# EAGLE board axiom_beta_sensor_cmv12000_v0.12.bfc06f58 (EAGLE 7.0.0), part 1 of 2
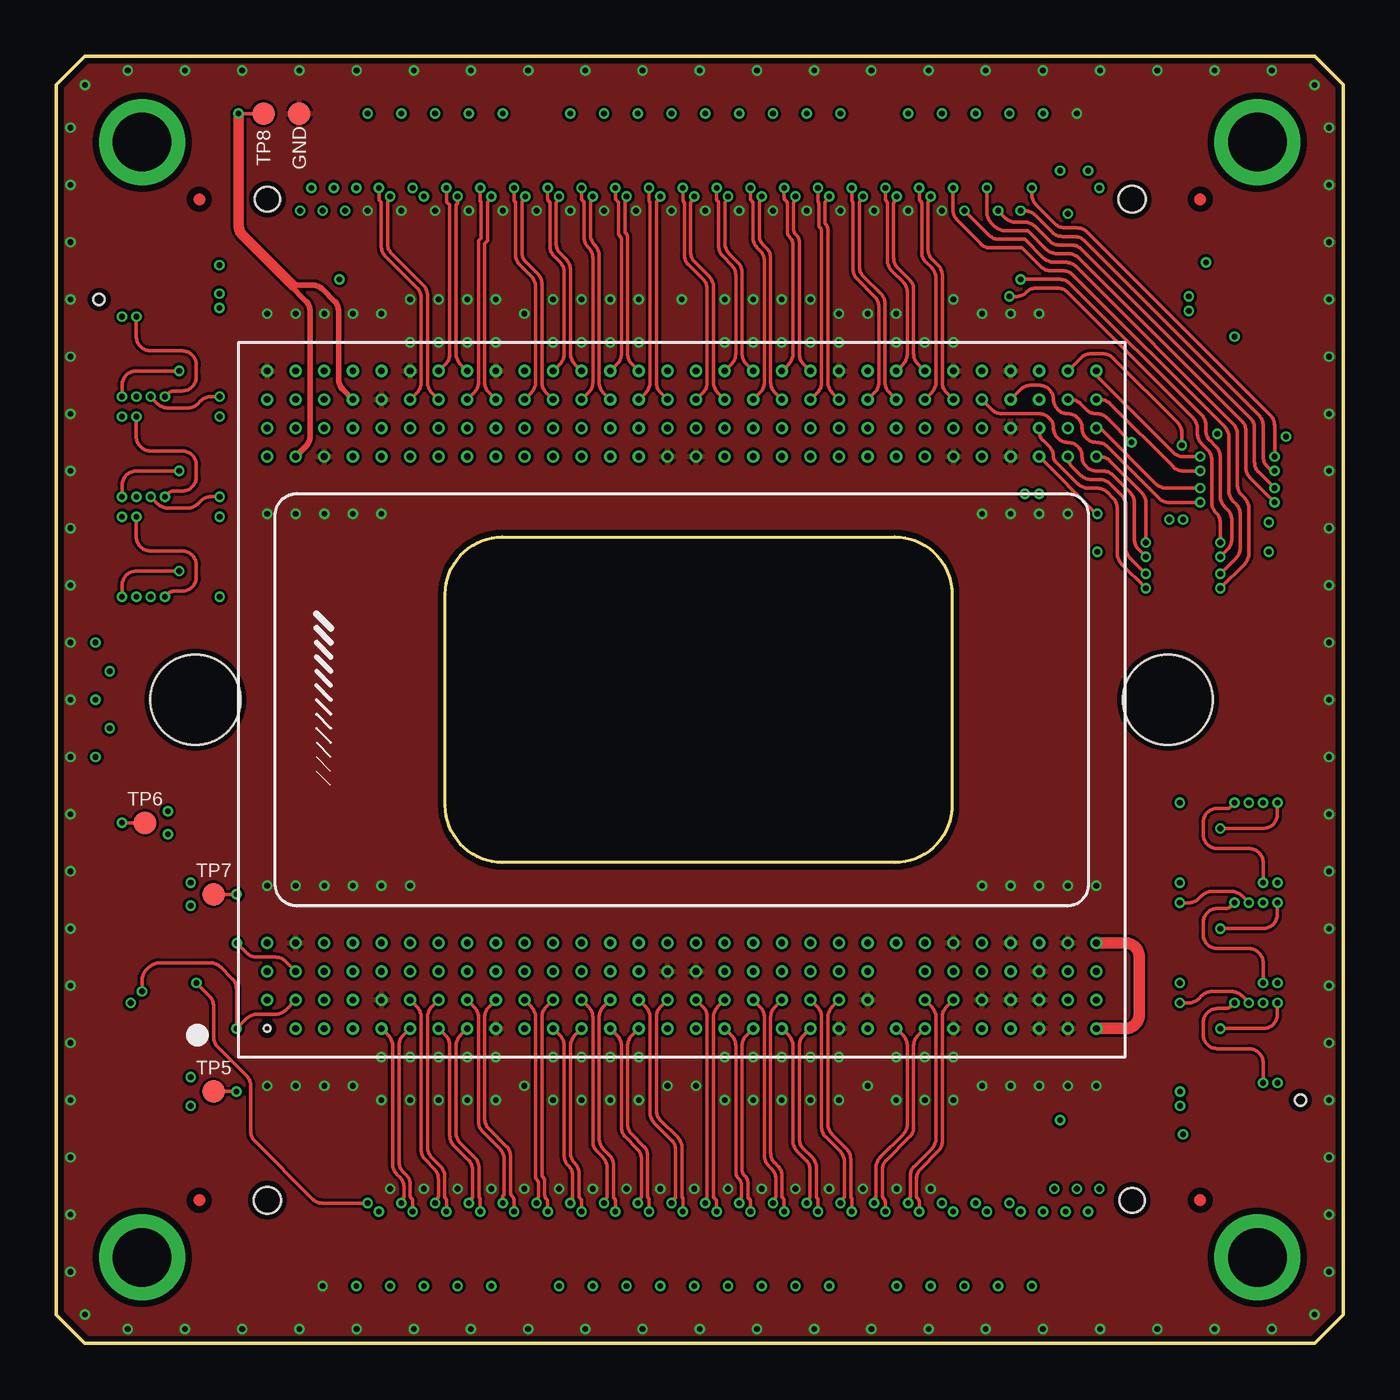
[diagram p0: board, top side]
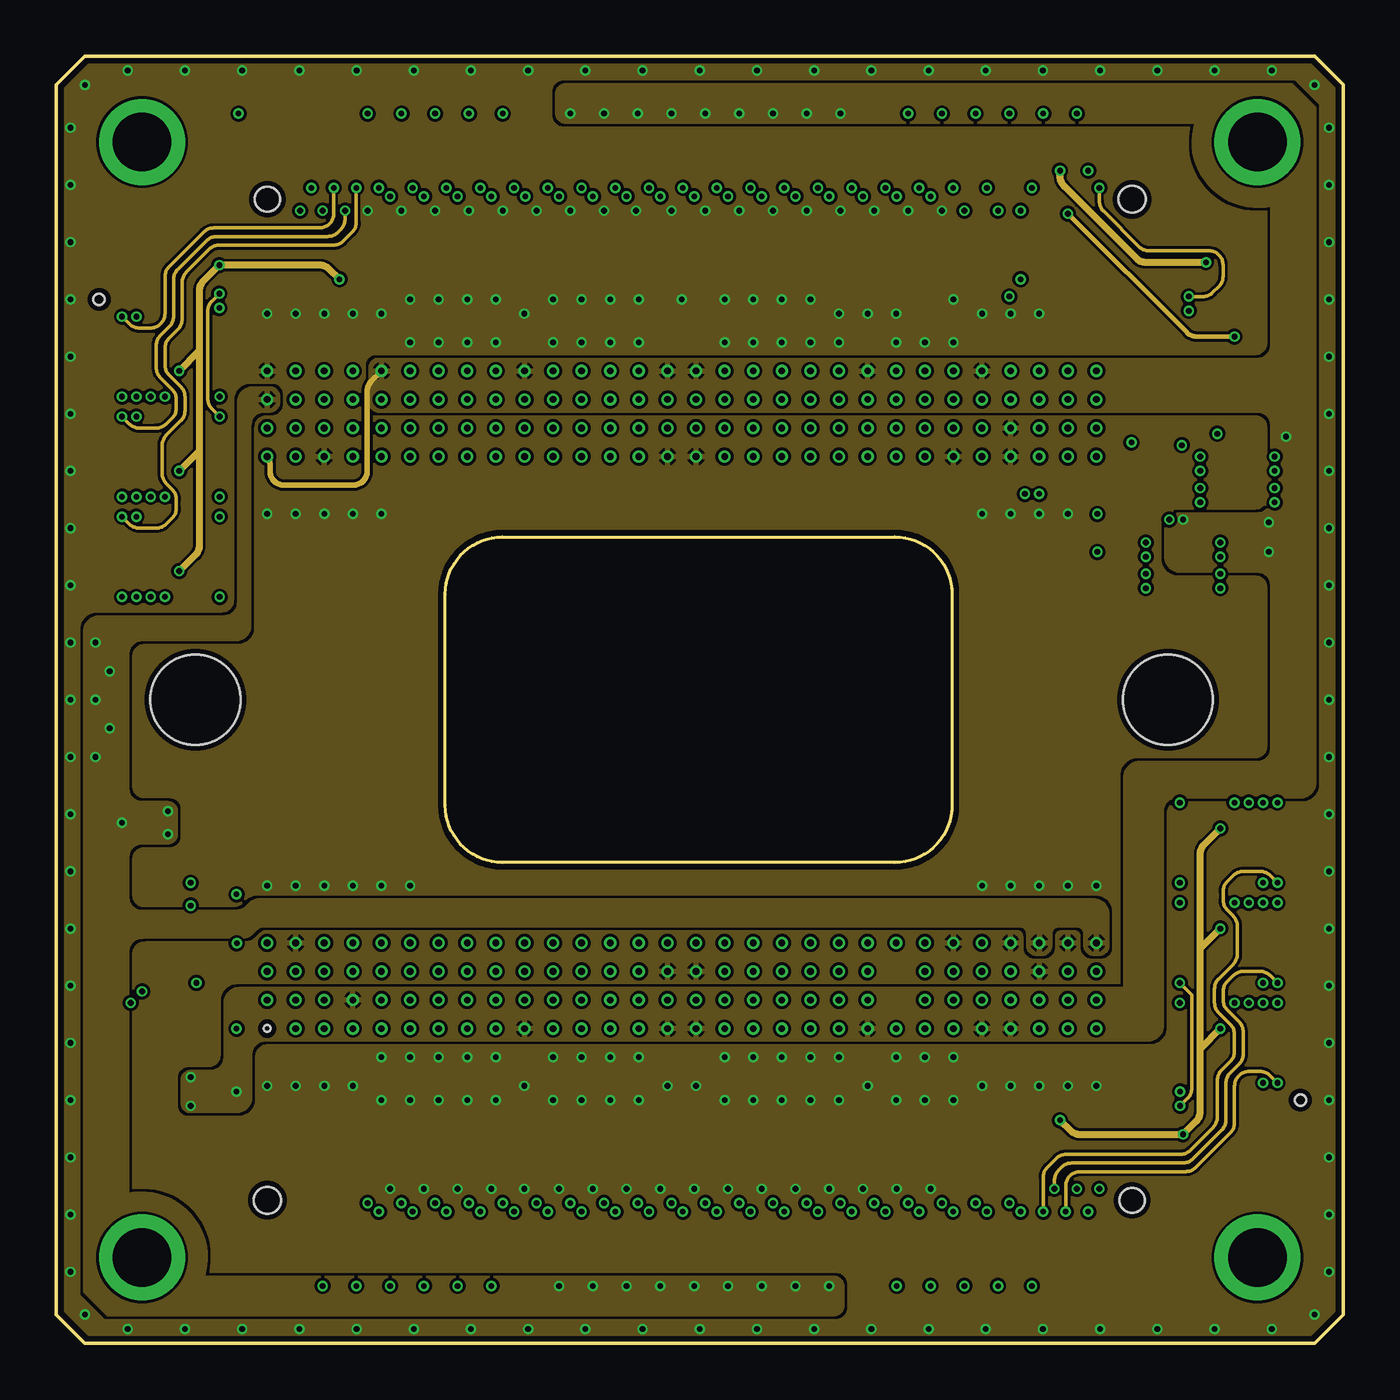
[diagram p1: board, inner layer Route2]
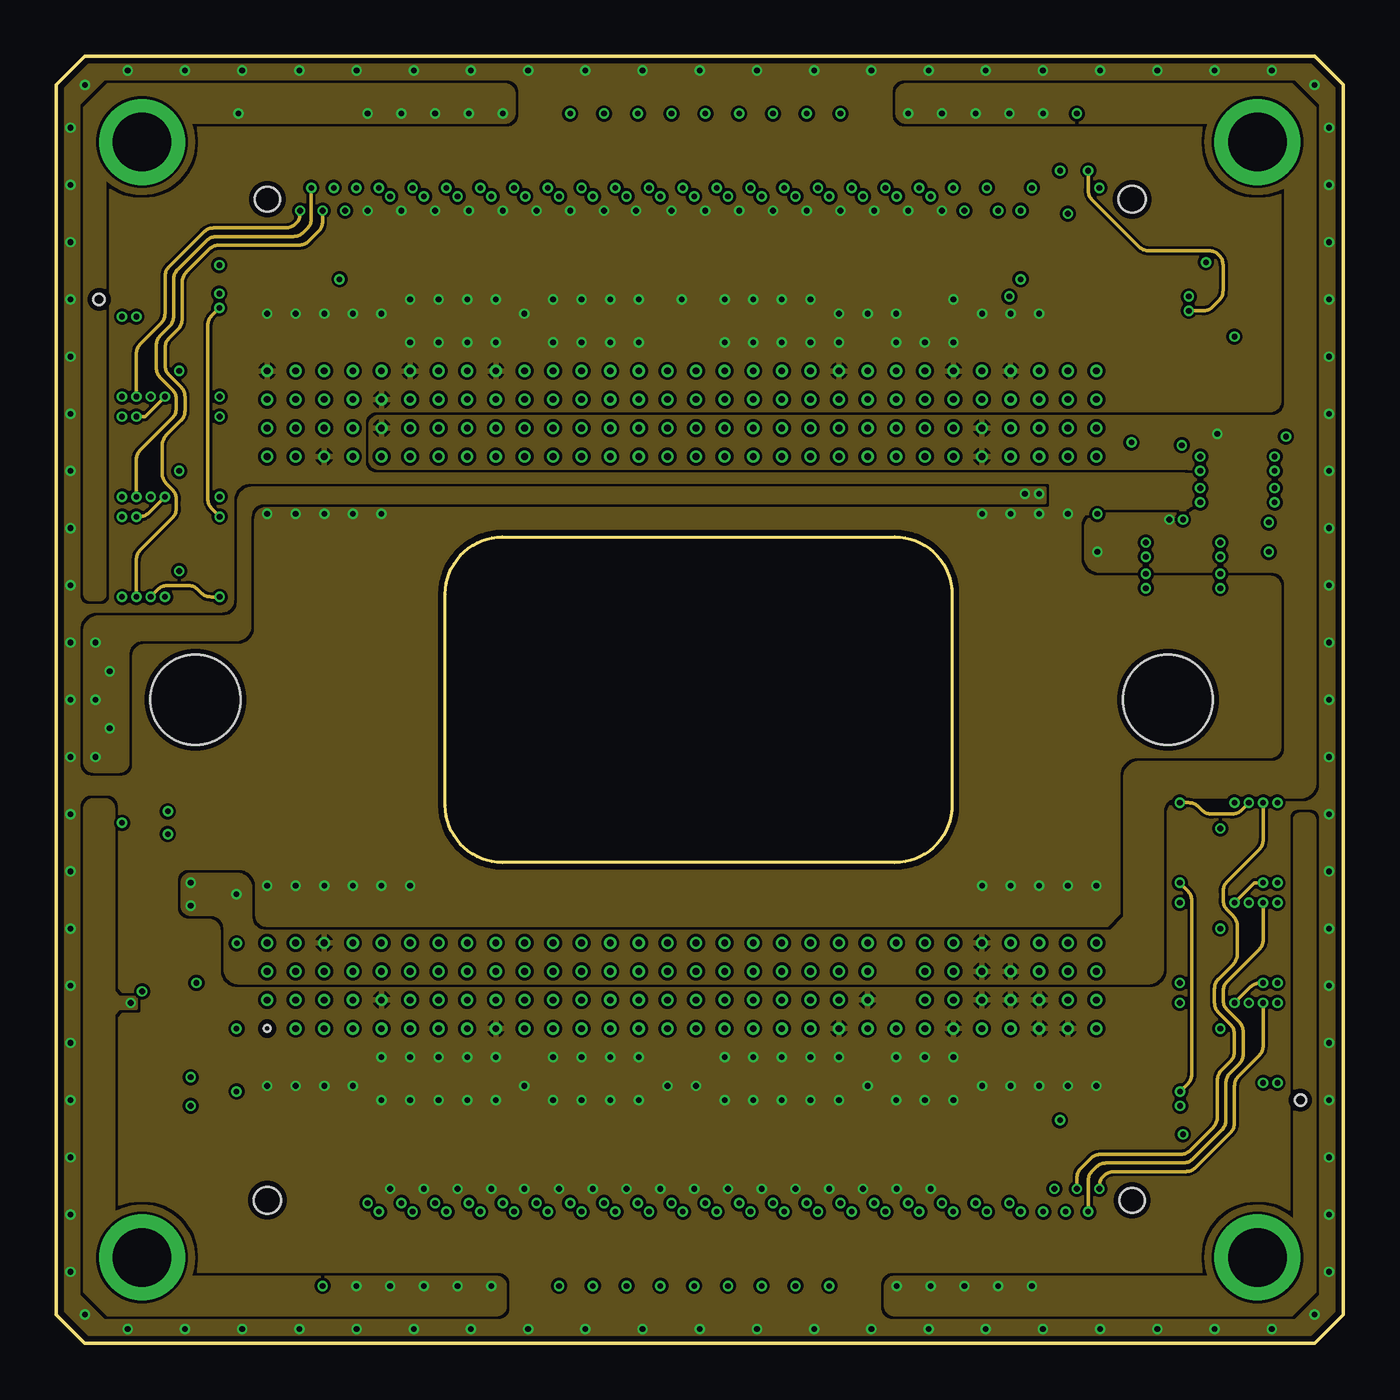
[diagram p2: board, inner layer Route15]
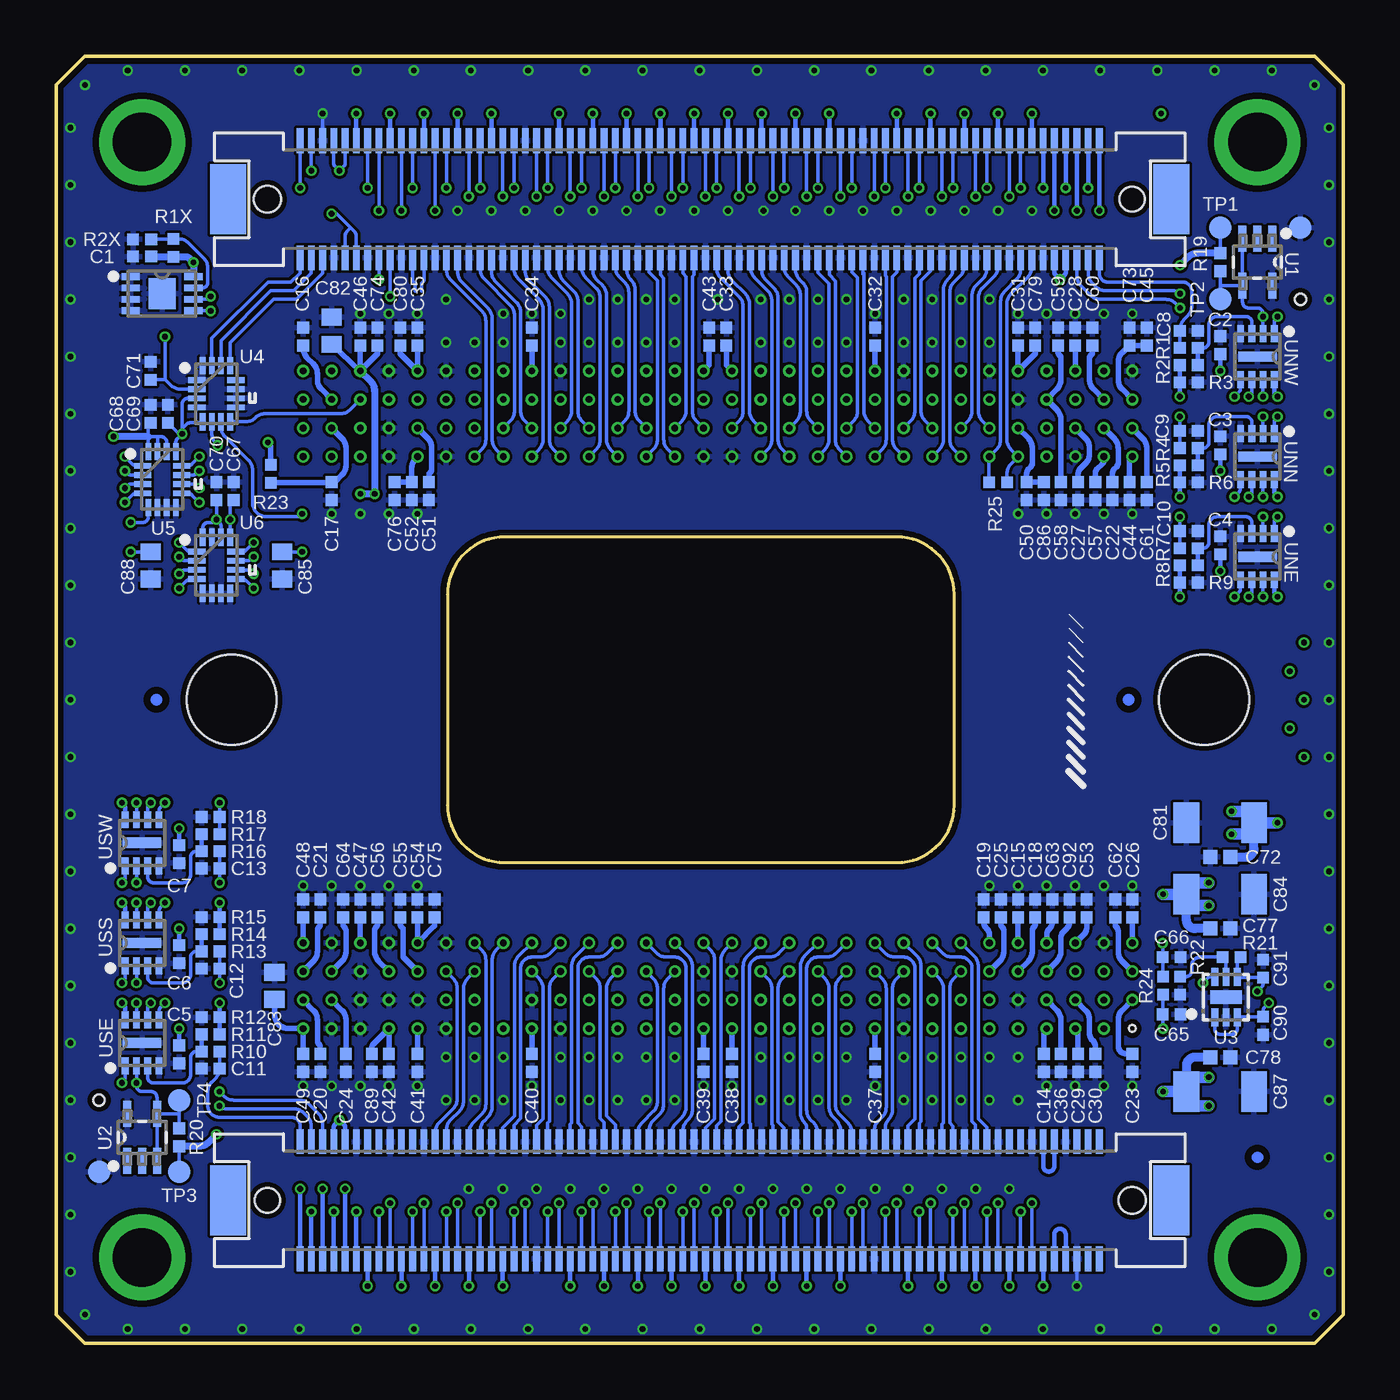
[diagram p3: board, bottom side, seen from below]

Size 57.15 x 57.15 mm. Coordinates in mm from the lower left corner, seen from the top.
Outline: 55.88,57.15 1.27,57.15 0,55.88 0,1.27 1.27,0 55.88,0 57.15,1.27 57.15,55.88 55.88,57.15
Outline: 37.23,21.34 19.81,21.34 arc-90 17.27,23.88 17.27,33.27 arc-90 19.81,35.8 37.23,35.8 arc-90 39.77,33.27 39.77,23.88 arc-90 37.23,21.34
Copper layers (1*2*15*16): Top 0.035559375mm / dielectric 0.17018125mm / Route2 0.01778125mm / dielectric 47mil / Route15 0.01778125mm / dielectric 0.17018125mm / Bottom 0.035559375mm
Design rules "axiom_beta_interface_OSHPark-4layer-tuned *": minimum track width 5mil, minimum drill 10mil, track to track 5mil, track to pad 5mil, pad to pad 5mil, via to via 5mil, smd to smd 5mil, copper to edge 10mil, drill to drill 6mil, minimum pad ring 4mil, minimum via ring 4mil, stop-mask expansion 2mil, vias tented up to drill 15mil, thermal gap 5mil
Net classes: 0 default: width 0.152 mm, drill 0.254 mm; 1 power: width 0.152 mm, drill 0.254 mm
Holes 4 mm at 49.36,28.57 6.18,28.57
Holes 0.5 mm at 55.25,10.79 1.9,46.36
bKeepout: area 1.4,24.8 to 13.4,32.4; area 43.9,24.8 to 56,32.4
tRestrict: area 51.1,1.6 to 55.5,6; area 1.6,51.1 to 6,55.5; area 51.1,51.1 to 55.5,55.5; area 1.6,1.6 to 6,6; area 5.8,5.8 to 6.9,6.9; area 50.2,50.2 to 51.4,51.4; area 5.8,50.2 to 6.9,51.4; area 50.2,5.8 to 51.4,6.9
bRestrict: area 51.1,1.6 to 55.5,6; area 1.6,51.1 to 6,55.5; area 51.1,51.1 to 55.5,55.5; area 1.6,1.6 to 6,6; area 3.3,7.7 to 4.4,8.8; area 52.1,28 to 53.3,29.1; area 9,28 to 10.1,29.1

## Footprints (pad centres in the part's own frame; a part is rotated, then mirrored left to right if it is on the bottom)
0402-C = smd 0.52 x 0.52: 1 -0.4,0; 2 0.4,0
0402-B = smd 0.62 x 0.62: 1 -0.45,0; 2 0.45,0
1206-B = smd 1.15 x 1.8: 1 -1.5,0; 2 1.5,0
0603-C = smd 0.75 x 0.9: 1 -0.6,0; 2 0.6,0
TP10R = smd 1 x 1: TP 0,0
10-30-07-237-400T4 = drill 0.3: A2 -17.945,-14.605; A3 -16.675,-14.605; A4 -15.405,-14.605; A5 -14.135,-14.605; A6 -12.865,-14.605; A7 -11.595,-14.605; A8 -10.325,-14.605; A9 -9.055,-14.605; A10 -7.785,-14.605; A11 -6.515,-14.605; A12 -5.245,-14.605; A13 -3.975,-14.605; A14 -2.705,-14.605; A15 -1.435,-14.605; A16 -0.165,-14.605; A17 1.105,-14.605; A18 2.375,-14.605; A19 3.645,-14.605; A20 4.915,-14.605; A21 6.185,-14.605; A22 7.455,-14.605; A23 8.725,-14.605; A24 9.995,-14.605; A25 11.265,-14.605; A26 12.535,-14.605; A27 13.805,-14.605; A28 15.075,-14.605; A29 16.345,-14.605; A30 17.615,-14.605; B1 -19.215,-13.335; B2 -17.945,-13.335; B3 -16.675,-13.335; B4 -15.405,-13.335; B5 -14.135,-13.335; B6 -12.865,-13.335; B7 -11.595,-13.335; B8 -10.325,-13.335; B9 -9.055,-13.335; B10 -7.785,-13.335; B11 -6.515,-13.335; B12 -5.245,-13.335; B13 -3.975,-13.335; B14 -2.705,-13.335; B15 -1.435,-13.335; B16 -0.165,-13.335; B17 1.105,-13.335; B18 2.375,-13.335; B19 3.645,-13.335; B20 4.915,-13.335; B21 6.185,-13.335; B22 7.455,-13.335; B24 9.995,-13.335; B25 11.265,-13.335; B26 12.535,-13.335; B27 13.805,-13.335; B28 15.075,-13.335; B29 16.345,-13.335; B30 17.615,-13.335; C1 -19.215,-12.065; C2 -17.945,-12.065; C3 -16.675,-12.065; C4 -15.405,-12.065; C5 -14.135,-12.065; C6 -12.865,-12.065; C7 -11.595,-12.065; C8 -10.325,-12.065; C9 -9.055,-12.065; C10 -7.785,-12.065; C11 -6.515,-12.065; C12 -5.245,-12.065; C13 -3.975,-12.065; C14 -2.705,-12.065; C15 -1.435,-12.065; C16 -0.165,-12.065; C17 1.105,-12.065; C18 2.375,-12.065; C19 3.645,-12.065; C20 4.915,-12.065; C21 6.185,-12.065; C22 7.455,-12.065; C24 9.995,-12.065; C25 11.265,-12.065; C26 12.535,-12.065; C27 13.805,-12.065; C28 15.075,-12.065; C29 16.345,-12.065; C30 17.615,-12.065; D1 -19.215,-10.795; D2 -17.945,-10.795; D3 -16.675,-10.795; D4 -15.405,-10.795; D5 -14.135,-10.795; D6 -12.865,-10.795; D7 -11.595,-10.795; D8 -10.325,-10.795; D9 -9.055,-10.795; D10 -7.785,-10.795; D11 -6.515,-10.795; D12 -5.245,-10.795; D13 -3.975,-10.795; D14 -2.705,-10.795; D15 -1.435,-10.795; D16 -0.165,-10.795; D17 1.105,-10.795; D18 2.375,-10.795; D19 3.645,-10.795; D20 4.915,-10.795; D21 6.185,-10.795; D22 7.455,-10.795; D23 8.725,-10.795; D24 9.995,-10.795; D25 11.265,-10.795; D26 12.535,-10.795; D27 13.805,-10.795; D28 15.075,-10.795; D29 16.345,-10.795; D30 17.615,-10.795; E1 -19.215,10.795; E2 -17.945,10.795; E3 -16.675,10.795; E4 -15.405,10.795; E5 -14.135,10.795; E6 -12.865,10.795; E7 -11.595,10.795; E8 -10.325,10.795; E9 -9.055,10.795; E10 -7.785,10.795; E11 -6.515,10.795; E12 -5.245,10.795; E13 -3.975,10.795; E14 -2.705,10.795; E15 -1.435,10.795; E16 -0.165,10.795; E17 1.105,10.795; E18 2.375,10.795; E19 3.645,10.795; E20 4.915,10.795; E21 6.185,10.795; E22 7.455,10.795; E23 8.725,10.795; E24 9.995,10.795; E25 11.265,10.795; E26 12.535,10.795; E27 13.805,10.795; E28 15.075,10.795; E29 16.345,10.795; E30 17.615,10.795; F1 -19.215,12.065; F2 -17.945,12.065; F3 -16.675,12.065; F4 -15.405,12.065; F5 -14.135,12.065; F6 -12.865,12.065; F7 -11.595,12.065; F8 -10.325,12.065; F9 -9.055,12.065; F10 -7.785,12.065; F11 -6.515,12.065; F12 -5.245,12.065; F13 -3.975,12.065; F14 -2.705,12.065; F15 -1.435,12.065; F16 -0.165,12.065; F17 1.105,12.065; F18 2.375,12.065; F19 3.645,12.065; F20 4.915,12.065; F21 6.185,12.065; F22 7.455,12.065; F23 8.725,12.065; F24 9.995,12.065; F25 11.265,12.065; F26 12.535,12.065; F27 13.805,12.065; F28 15.075,12.065; F29 16.345,12.065; F30 17.615,12.065; G1 -19.215,13.335; G2 -17.945,13.335; G3 -16.675,13.335; G4 -15.405,13.335; G5 -14.135,13.335; G6 -12.865,13.335; G7 -11.595,13.335; G8 -10.325,13.335; G9 -9.055,13.335; G10 -7.785,13.335; G11 -6.515,13.335; G12 -5.245,13.335; G13 -3.975,13.335; G14 -2.705,13.335; G15 -1.435,13.335; G16 -0.165,13.335; G17 1.105,13.335; G18 2.375,13.335; G19 3.645,13.335; G20 4.915,13.335; G21 6.185,13.335; G22 7.455,13.335; G23 8.725,13.335; G24 9.995,13.335; G25 11.265,13.335; G26 12.535,13.335; G27 13.805,13.335; G28 15.075,13.335; G29 16.345,13.335; G30 17.615,13.335; H1 -19.215,14.605; H2 -17.945,14.605; H3 -16.675,14.605; H4 -15.405,14.605; H5 -14.135,14.605; H6 -12.865,14.605; H7 -11.595,14.605; H8 -10.325,14.605; H9 -9.055,14.605; H10 -7.785,14.605; H11 -6.515,14.605; H12 -5.245,14.605; H13 -3.975,14.605; H14 -2.705,14.605; H15 -1.435,14.605; H16 -0.165,14.605; H17 1.105,14.605; H18 2.375,14.605; H19 3.645,14.605; H20 4.915,14.605; H21 6.185,14.605; H22 7.455,14.605; H23 8.725,14.605; H24 9.995,14.605; H25 11.265,14.605; H26 12.535,14.605; H27 13.805,14.605; H28 15.075,14.605; H29 16.345,14.605; H30 17.615,14.605 | hole 0.3: -19.215,-14.605
SOT65P210X110-5N = smd 1.168 x 0.356: 1 -1.041,0.66; 2 -1.041,0; 3 -1.041,-0.66; 4 1.041,-0.66; 5 1.041,0.66
MLF-6 = smd 0.3 x 0.8: 1 -0.5,-0.9; 2 0,-0.9; 3 0.5,-0.9; 4 0.5,0.9; 5 0,0.9; 6 -0.5,0.9 | smd 1.4 x 0.6: EP 0,0
QFN40P185X265X55-16N = smd 0.762 x 0.254: 1 -0.864,0.61; 2 -0.864,0.203; 3 -0.864,-0.203; 4 -0.864,-0.61; 9 0.864,-0.61; 10 0.864,-0.203; 11 0.864,0.203; 12 0.864,0.61 | smd 0.254 x 0.762: 5 -0.61,-1.245; 6 -0.203,-1.245; 7 0.203,-1.245; 8 0.61,-1.245; 13 0.61,1.245; 14 0.203,1.245; 15 -0.203,1.245; 16 -0.61,1.245
DFN200X300X100-9N = smd 0.813 x 0.305: 1 -1.397,0.762; 2 -1.397,0.254; 3 -1.397,-0.254; 4 -1.397,-0.762; 5 1.397,-0.762; 6 1.397,-0.254; 7 1.397,0.254; 8 1.397,0.762 | smd 1.194 x 1.397: EP 0,0
DFN200X200X100-9N = smd 0.75 x 0.3: 1 -1.025,0.75; 2 -1.025,0.25; 3 -1.025,-0.25; 4 -1.025,-0.75; 5 1.025,-0.75; 6 1.025,-0.25; 7 1.025,0.25; 8 1.025,0.75 | smd 0.45 x 1.7: EP 0,0
FX10A-144P = smd 0.3 x 1.1: 1 -17.75,-2.6; 2 -17.75,2.6; 3 -17.25,-2.6; 4 -17.25,2.6; 5 -16.75,-2.6; 6 -16.75,2.6; 7 -16.25,-2.6; 8 -16.25,2.6; 9 -15.75,-2.6; 10 -15.75,2.6; 11 -15.25,-2.6; 12 -15.25,2.6; 13 -14.75,-2.6; 14 -14.75,2.6; 15 -14.25,-2.6; 16 -14.25,2.6; 17 -13.75,-2.6; 18 -13.75,2.6; 19 -13.25,-2.6; 20 -13.25,2.6; 21 -12.75,-2.6; 22 -12.75,2.6; 23 -12.25,-2.6; 24 -12.25,2.6; 25 -11.75,-2.6; 26 -11.75,2.6; 27 -11.25,-2.6; 28 -11.25,2.6; 29 -10.75,-2.6; 30 -10.75,2.6; 31 -10.25,-2.6; 32 -10.25,2.6; 33 -9.75,-2.6; 34 -9.75,2.6; 35 -9.25,-2.6; 36 -9.25,2.6; 37 -8.75,-2.6; 38 -8.75,2.6; 39 -8.25,-2.6; 40 -8.25,2.6; 41 -7.75,-2.6; 42 -7.75,2.6; 43 -7.25,-2.6; 44 -7.25,2.6; 45 -6.75,-2.6; 46 -6.75,2.6; 47 -6.25,-2.6; 48 -6.25,2.6; 49 -5.75,-2.6; 50 -5.75,2.6; 51 -5.25,-2.6; 52 -5.25,2.6; 53 -4.75,-2.6; 54 -4.75,2.6; 55 -4.25,-2.6; 56 -4.25,2.6; 57 -3.75,-2.6; 58 -3.75,2.6; 59 -3.25,-2.6; 60 -3.25,2.6; 61 -2.75,-2.6; 62 -2.75,2.6; 63 -2.25,-2.6; 64 -2.25,2.6; 65 -1.75,-2.6; 66 -1.75,2.6; 67 -1.25,-2.6; 68 -1.25,2.6; 69 -0.75,-2.6; 70 -0.75,2.6; 71 -0.25,-2.6; 72 -0.25,2.6; 73 0.25,-2.6; 74 0.25,2.6; 75 0.75,-2.6; 76 0.75,2.6; 77 1.25,-2.6; 78 1.25,2.6; 79 1.75,-2.6; 80 1.75,2.6; 81 2.25,-2.6; 82 2.25,2.6; 83 2.75,-2.6; 84 2.75,2.6; 85 3.25,-2.6; 86 3.25,2.6; 87 3.75,-2.6; 88 3.75,2.6; 89 4.25,-2.6; 90 4.25,2.6; 91 4.75,-2.6; 92 4.75,2.6; 93 5.25,-2.6; 94 5.25,2.6; 95 5.75,-2.6; 96 5.75,2.6; 97 6.25,-2.6; 98 6.25,2.6; 99 6.75,-2.6; 100 6.75,2.6; 101 7.25,-2.6; 102 7.25,2.6; 103 7.75,-2.6; 104 7.75,2.6; 105 8.25,-2.6; 106 8.25,2.6; 107 8.75,-2.6; 108 8.75,2.6; 109 9.25,-2.6; 110 9.25,2.6; 111 9.75,-2.6; 112 9.75,2.6; 113 10.25,-2.6; 114 10.25,2.6; 115 10.75,-2.6; 116 10.75,2.6; 117 11.25,-2.6; 118 11.25,2.6; 119 11.75,-2.6; 120 11.75,2.6; 121 12.25,-2.6; 122 12.25,2.6; 123 12.75,-2.6; 124 12.75,2.6; 125 13.25,-2.6; 126 13.25,2.6; 127 13.75,-2.6; 128 13.75,2.6; 129 14.25,-2.6; 130 14.25,2.6; 131 14.75,-2.6; 132 14.75,2.6; 133 15.25,-2.6; 134 15.25,2.6; 135 15.75,-2.6; 136 15.75,2.6; 137 16.25,-2.6; 138 16.25,2.6; 139 16.75,-2.6; 140 16.75,2.6; 141 17.25,-2.6; 142 17.25,2.6; 143 17.75,-2.6; 144 17.75,2.6 | smd 1.6 x 3.1: M1 -20.95,0; M2 20.95,0 | hole 1.1: -19.2,0 | hole 1.2: 19.2,0

## Placement (x,y rotation side)
C1  100n  [0402-C]  53.34,48.26 180 bottom
C2  100n  [0402-C]  5.46,44.32 90 bottom
C3  100n  [0402-C]  5.46,39.88 90 bottom
C4  100n  [0402-C]  5.46,35.43 90 bottom
C5  100n  [0402-C]  51.69,12.83 270 bottom
C6  100n  [0402-C]  51.69,17.27 270 bottom
C7  100n  [0402-C]  51.69,21.72 270 bottom
C8  1µ  [0402-C]  6.86,44.96 0 bottom
C9  1µ  [0402-C]  6.86,40.51 0 bottom
C10  1µ  [0402-C]  6.86,36.07 0 bottom
C11  1µ  [0402-C]  50.29,12.19 180 bottom
C12  1µ  [0402-C]  50.29,16.64 180 bottom
C13  1µ  [0402-C]  50.29,21.08 180 bottom
C14  100n  [0402-C]  13.3,12.45 270 bottom
C15  100n  [0402-C]  14.44,19.3 90 bottom
C16  100n  [0402-C]  46.19,44.7 90 bottom
C17  100n  [0402-C]  44.92,37.85 270 bottom
C18  100n  [0402-C]  13.68,19.3 90 bottom
C19  100n  [0402-C]  15.96,19.3 90 bottom
C20  100n  [0402-C]  45.43,12.45 270 bottom
C21  100n  [0402-C]  45.43,19.3 90 bottom
C22  100n  [0402-C]  10.25,37.85 90 bottom
C23  100n  [0402-C]  9.36,12.45 90 bottom
C24  100n  [0402-C]  44.28,12.45 90 bottom
C25  100n  [0402-C]  15.2,19.3 270 bottom
C26  100n  [0402-C]  9.36,19.3 270 bottom
C27  100n  [0402-C]  11.77,37.85 90 bottom
C28  100n  [0402-C]  11.9,44.7 270 bottom
C29  100n  [0402-C]  11.77,12.45 270 bottom
C30  100n  [0402-C]  11.01,12.45 270 bottom
C31  100n  [0402-C]  14.44,44.7 90 bottom
C32  100n  [0402-C]  20.79,44.7 90 bottom
C33  100n  [0402-C]  27.39,44.7 90 bottom
C34  100n  [0402-C]  36.03,44.7 90 bottom
C35  100n  [0402-C]  41.11,44.7 90 bottom
C36  100n  [0402-C]  12.54,12.45 270 bottom
C37  100n  [0402-C]  20.79,12.45 270 bottom
C38  100n  [0402-C]  27.14,12.45 270 bottom
C39  100n  [0402-C]  28.41,12.45 270 bottom
C40  100n  [0402-C]  36.03,12.45 270 bottom
C41  100n  [0402-C]  41.11,12.45 270 bottom
C42  100n  [0402-C]  42.38,12.45 270 bottom
C43  100n  [0402-C]  28.16,44.7 90 bottom
C44  100n  [0402-C]  9.49,37.85 270 bottom
C45  100n  [0402-C]  8.72,44.7 90 bottom
C46  100n  [0402-C]  43.65,44.7 90 bottom
C47  100n  [0402-C]  43.65,19.3 90 bottom
C48  100n  [0402-C]  46.19,19.3 90 bottom
C49  100n  [0402-C]  46.19,12.45 270 bottom
C50  100n  [0402-C]  14.06,37.85 270 bottom
C51  100n  [0402-C]  40.6,37.85 270 bottom
C52  100n  [0402-C]  41.36,37.85 270 bottom
C53  100n  [0402-C]  11.39,19.3 90 bottom
C54  100n  [0402-C]  41.11,19.3 90 bottom
C55  100n  [0402-C]  41.87,19.3 90 bottom
C56  100n  [0402-C]  42.89,19.3 90 bottom
C57  100n  [0402-C]  11.01,37.85 270 bottom
C58  100n  [0402-C]  12.54,37.85 270 bottom
C59  4µ7  [0402-C]  12.66,44.7 90 bottom
C60  100n  [0402-C]  11.14,44.7 90 bottom
C61  100n  [0402-C]  8.72,37.85 270 bottom
C62  100n  [0402-C]  10.12,19.3 90 bottom
C63  100n  [0402-C]  12.92,19.3 90 bottom
C64  100n  [0402-C]  44.41,19.3 90 bottom
C65  100n  [0402-C]  7.62,14.6 0 bottom
C66  100n  [0402-C]  7.62,17.14 0 bottom
C67  100n  [0402-C]  49.28,37.85 90 bottom
C68  100n  [0402-C]  52.96,41.27 90 bottom
C69  100n  [0402-C]  52.2,41.27 90 bottom
C70  100n  [0402-C]  50.04,37.85 90 bottom
C71  100n  [0402-C]  52.96,43.18 90 bottom
C72  4µ7  [0402-B]  5.46,21.59 180 bottom
C73  4µ7  [0402-C]  9.49,44.7 90 bottom
C74  4µ7  [0402-C]  42.89,44.7 90 bottom
C75  4µ7  [0402-C]  40.35,19.3 90 bottom
C76  4µ7  [0402-C]  42.13,37.85 270 bottom
C77  4µ7  [0402-B]  5.46,18.41 0 bottom
C78  4µ7  [0402-B]  5.46,12.7 0 bottom
C79  4µ7  [0402-C]  13.68,44.7 90 bottom
C80  4µ7  [0402-C]  41.87,44.7 90 bottom
C81  100µ  [1206-B]  5.46,23.11 180 bottom
C82  10µ  [0603-C]  44.92,44.96 90 bottom
C83  10µ  [0603-C]  47.46,15.88 90 bottom
C84  100µ  [1206-B]  5.46,19.94 0 bottom
C85  10µ  [0603-C]  47.12,34.54 270 bottom
C86  4µ7  [0402-C]  13.3,37.85 270 bottom
C87  100µ  [1206-B]  5.46,11.18 0 bottom
C88  10µ  [0603-C]  52.96,34.54 270 bottom
C89  4µ7  [0402-C]  43.14,12.45 270 bottom
C90  4µ7  [0402-C]  3.56,14.1 270 bottom
C91  4µ7  [0402-C]  3.56,16.64 270 bottom
C92  100n  [0402-C]  12.15,19.3 90 bottom
GND  TPTP10R  [TP10R]  10.79,54.61 0 top
GND75  TPTP10R  [TP10R]  1.9,49.53 180 bottom
GND77  TPTP10R  [TP10R]  55.25,7.62 180 bottom
PARALLELLA  [PARALLELLA-FRAME]  28.57,28.57 0 top
R1  [0402-C]  6.86,44.2 0 bottom
R1X  [0402-C]  51.94,48.64 90 bottom
R2  [0402-C]  6.86,43.43 180 bottom
R2X  [0402-C]  53.34,49.02 180 bottom
R3  [0402-C]  6.86,42.67 0 bottom
R4  [0402-C]  6.86,39.75 0 bottom
R5  [0402-C]  6.86,38.99 180 bottom
R6  [0402-C]  6.86,38.23 0 bottom
R7  [0402-C]  6.86,35.31 0 bottom
R8  [0402-C]  6.86,34.54 180 bottom
R9  [0402-C]  6.86,33.78 0 bottom
R10  [0402-C]  50.29,12.95 180 bottom
R11  [0402-C]  50.29,13.72 0 bottom
R12  [0402-C]  50.29,14.48 180 bottom
R13  [0402-C]  50.29,17.4 180 bottom
R14  [0402-C]  50.29,18.16 0 bottom
R15  [0402-C]  50.29,18.92 180 bottom
R16  [0402-C]  50.29,21.84 180 bottom
R17  [0402-C]  50.29,22.61 0 bottom
R18  [0402-C]  50.29,23.37 180 bottom
R19  [0402-C]  5.46,48.01 270 bottom
R20  [0402-C]  51.69,9.14 90 bottom
R21  [0402-C]  4.95,17.14 0 bottom
R22  [0402-C]  7.24,15.88 90 bottom
R23  [0402-C]  47.62,38.61 270 bottom
R24  [0402-C]  8,15.88 90 bottom
R25  [0402-C]  15.33,38.23 180 bottom
SENSOR  CMV12000ANDON  [10-30-07-237-400T4]  28.57,28.57 0 top
TP1  TPTP10R  [TP10R]  5.46,49.53 0 bottom
TP2  TPTP10R  [TP10R]  5.46,46.36 0 bottom
TP3  TPTP10R  [TP10R]  51.69,7.62 0 bottom
TP4  TPTP10R  [TP10R]  51.69,10.79 0 bottom
TP5  TPTP10R  [TP10R]  6.98,11.18 0 top
TP6  TPTP10R  [TP10R]  3.94,23.11 0 top
TP7  TPTP10R  [TP10R]  6.98,19.94 0 top
TP8  TPTP10R  [TP10R]  9.21,54.61 0 top
U1  TLV431ACDCKR  [SOT65P210X110-5N]  3.81,48.01 270 bottom
U2  TLV431ACDCKR  [SOT65P210X110-5N]  53.34,9.14 90 bottom
U3  MIC47050  [MLF-6]  5.21,15.37 0 bottom
U4  SN74AVC4T245RSV  [QFN40P185X265X55-16N]  50.04,42.16 0 bottom
U5  SN74AVC4T774RSV  [QFN40P185X265X55-16N]  52.45,38.35 0 bottom
U6  SN74AVC4T774RSV  [QFN40P185X265X55-16N]  50.04,34.54 0 bottom
U$1  [µZ-FRAME]  28.57,28.57 0 top
UEP  BR24G04NUX  [DFN200X300X100-9N]  52.45,46.61 0 bottom
UNE  TS332IQ2T  [DFN200X200X100-9N]  3.81,34.92 270 bottom
UNN  TS332IQ2T  [DFN200X200X100-9N]  3.81,39.37 270 bottom
UNW  TS332IQ2T  [DFN200X200X100-9N]  3.81,43.81 270 bottom
USE  TS332IQ2T  [DFN200X200X100-9N]  53.34,13.33 90 bottom
USS  TS332IQ2T  [DFN200X200X100-9N]  53.34,17.78 90 bottom
USW  TS332IQ2T  [DFN200X200X100-9N]  53.34,22.23 90 bottom
X-NORTH  FX10-144P  [FX10A-144P]  28.57,50.8 180 bottom
X-SOUTH  FX10-144P  [FX10A-144P]  28.57,6.35 0 bottom

## Library data of the parts
C1-C92 R1 R1X R2 R2X R3-R25 = generic-rcl
GND GND75 GND77 TP1-TP8 = testpad
PARALLELLA = parallella
SENSOR = cmosis
U1 U2 = vref
U3 = ldo
U4-U6 = lvltrans
U$1 = microzed
UEP = eeprom
UNE UNN UNW USE USS USW = comparator
X-NORTH X-SOUTH = fx10

## Nets
CLK_IN: SENSOR.E30 U6.12
FRAME_REQ: SENSOR.G30 U5.11
GND: C1.2 C2.2 C3.2 C4.2 C5.2 C6.2 C7.2 C8.2 C9.2 C10.2 C11.2 C12.2 C13.2 C14.2 C15.2 C16.2 C17.2 C18.2 C19.2 C20.2 C21.2 C22.1 C23.1 C24.1 C25.1 C26.1 C27.1 C28.1 C29.2 C30.2 C31.2 C32.2 C33.2 C34.2 C35.2 C36.2 C37.2 C38.2 C39.2 C40.2 C41.2 C42.2 C43.2 C44.2 C45.2 C46.2 C47.2 C48.2 C49.2 C50.2 C51.2 C52.2 C53.2 C54.2 C55.2 C56.2 C57.2 C58.2 C59.2 C60.2 C61.2 C62.2 C63.2 C64.2 C65.2 C66.2 C67.2 C68.2 C69.2 C70.2 C71.2 C72.2 C73.2 C74.2 C75.2 C76.2 C77.2 C78.2 C79.2 C80.2 C81.2 C82.2 C83.2 C84.2 C85.2 C86.2 C87.2 C88.2 C89.2 C90.2 C91.1 C92.2 GND75.TP GND77.TP GND.TP R2X.2 R3.2 R6.2 R9.2 R12.2 R15.2 R18.2 R22.1 SENSOR.A9 SENSOR.A21 SENSOR.A25 SENSOR.A28 SENSOR.A29 SENSOR.B5 SENSOR.B22 SENSOR.B26 SENSOR.B27 SENSOR.B28 SENSOR.C15 SENSOR.C16 SENSOR.C28 SENSOR.D2 SENSOR.D25 SENSOR.D27 SENSOR.D29 SENSOR.E3 SENSOR.E15 SENSOR.E16 SENSOR.E25 SENSOR.E27 SENSOR.F27 SENSOR.G5 SENSOR.H1 SENSOR.H6 SENSOR.H9 SENSOR.H21 SENSOR.H25 SENSOR.H27 U1.5 U2.5 U3.2 U3.EP U4.1 U4.4 U4.9 U4.10 U4.11 U4.16 U5.6 U5.7 U5.8 U6.5 U6.6 U6.7 U6.8 U6.15 UEP.1 UEP.2 UEP.3 UEP.4 UEP.EP UNE.4 UNE.EP UNN.4 UNN.EP UNW.4 UNW.EP USE.4 USE.EP USS.4 USS.EP USW.4 USW.EP X-NORTH.12 X-NORTH.18 X-NORTH.24 X-NORTH.30 X-NORTH.36 X-NORTH.42 X-NORTH.43 X-NORTH.48 X-NORTH.54 X-NORTH.60 X-NORTH.66 X-NORTH.72 X-NORTH.78 X-NORTH.84 X-NORTH.90 X-NORTH.96 X-NORTH.102 X-NORTH.103 X-NORTH.108 X-NORTH.114 X-NORTH.120 X-NORTH.126 X-NORTH.132 X-NORTH.138 X-NORTH.139 X-SOUTH.12 X-SOUTH.18 X-SOUTH.24 X-SOUTH.30 X-SOUTH.36 X-SOUTH.42 X-SOUTH.43 X-SOUTH.48 X-SOUTH.54 X-SOUTH.60 X-SOUTH.66 X-SOUTH.72 X-SOUTH.78 X-SOUTH.84 X-SOUTH.90 X-SOUTH.96 X-SOUTH.102 X-SOUTH.103 X-SOUTH.108 X-SOUTH.114 X-SOUTH.120 X-SOUTH.126 X-SOUTH.132 X-SOUTH.138 X-SOUTH.139
N00_N: R25.2 SENSOR.E6 X-NORTH.16
N00_P: R25.1 SENSOR.E5 X-NORTH.14
N01_N: SENSOR.G7 X-NORTH.17
N01_P: SENSOR.G6 X-NORTH.15
N02_N: SENSOR.F7 X-NORTH.22
N02_P: SENSOR.F6 X-NORTH.20
N03_N: X-NORTH.23
N03_P: X-NORTH.21
N04_N: SENSOR.E8 X-NORTH.28
N04_P: SENSOR.E7 X-NORTH.26
N05_N: SENSOR.H8 X-NORTH.29
N05_P: SENSOR.H7 X-NORTH.27
N06_N: SENSOR.F9 X-NORTH.34
N06_P: SENSOR.F8 X-NORTH.32
N07_N: SENSOR.G9 X-NORTH.35
N07_P: SENSOR.G8 X-NORTH.33
N08_N: SENSOR.E10 X-NORTH.40
N08_P: SENSOR.E9 X-NORTH.38
N09_N: SENSOR.G11 X-NORTH.41
N09_P: SENSOR.G10 X-NORTH.39
N10_N: SENSOR.F11 X-NORTH.46
N10_P: SENSOR.F10 X-NORTH.44
N11_N: SENSOR.H12 X-NORTH.47
N11_P: SENSOR.H11 X-NORTH.45
N12_N: SENSOR.E12 X-NORTH.52
N12_P: SENSOR.E11 X-NORTH.50
N13_N: SENSOR.G13 X-NORTH.53
N13_P: SENSOR.G12 X-NORTH.51
N14_N: SENSOR.F13 X-NORTH.58
N14_P: SENSOR.F12 X-NORTH.56
N15_N: SENSOR.H14 X-NORTH.59
N15_P: SENSOR.H13 X-NORTH.57
N16_N: SENSOR.E14 X-NORTH.64
N16_P: SENSOR.E13 X-NORTH.62
N17_N: SENSOR.G15 X-NORTH.65
N17_P: SENSOR.G14 X-NORTH.63
N18_N: SENSOR.F15 X-NORTH.70
N18_P: SENSOR.F14 X-NORTH.68
N19_N: SENSOR.G17 X-NORTH.71
N19_P: SENSOR.G16 X-NORTH.69
N20_N: SENSOR.F17 X-NORTH.76
N20_P: SENSOR.F16 X-NORTH.74
N21_N: SENSOR.H18 X-NORTH.77
N21_P: SENSOR.H17 X-NORTH.75
N22_N: SENSOR.E18 X-NORTH.82
N22_P: SENSOR.E17 X-NORTH.80
N23_N: SENSOR.G19 X-NORTH.83
N23_P: SENSOR.G18 X-NORTH.81
N24_N: SENSOR.F19 X-NORTH.88
N24_P: SENSOR.F18 X-NORTH.86
N25_N: SENSOR.H20 X-NORTH.89
N25_P: SENSOR.H19 X-NORTH.87
N26_N: SENSOR.E20 X-NORTH.94
N26_P: SENSOR.E19 X-NORTH.92
N27_N: SENSOR.G21 X-NORTH.95
N27_P: SENSOR.G20 X-NORTH.93
N28_N: SENSOR.F21 X-NORTH.100
N28_P: SENSOR.F20 X-NORTH.98
N29_N: SENSOR.G23 X-NORTH.101
N29_P: SENSOR.G22 X-NORTH.99
N30_N: SENSOR.E22 X-NORTH.106
N30_P: SENSOR.E21 X-NORTH.104
N31_N: SENSOR.H24 X-NORTH.107
N31_P: SENSOR.H23 X-NORTH.105
N32_N: SENSOR.F23 X-NORTH.112
N32_P: SENSOR.F22 X-NORTH.110
N33_N: SENSOR.G25 X-NORTH.113
N33_P: SENSOR.G24 X-NORTH.111
N34_N: SENSOR.E24 X-NORTH.118
N34_P: SENSOR.E23 X-NORTH.116
N35_N: U6.4 X-NORTH.119
N35_P: U6.3 X-NORTH.117
N36_N: X-NORTH.124
N36_P: X-NORTH.122
N37_N: U5.3 X-NORTH.125
N37_P: U5.4 X-NORTH.123
N38_N: U6.2 X-NORTH.130
N38_P: U6.1 X-NORTH.128
N39_N: U5.1 X-NORTH.131
N39_P: U5.2 X-NORTH.129
N$1: R1X.2 R2X.1 UEP.7
N$5: C60.1 SENSOR.G2
N$6: C61.1 SENSOR.F1
N$11: C62.1 SENSOR.C1
N$12: C63.1 SENSOR.D4
N$15: C64.1 SENSOR.C29
N$16: C92.1 SENSOR.C4
N$17: C14.1 SENSOR.A4
N$18: C15.1 SENSOR.D5
N$19: R21.1 R22.2 U3.5
N$21: C18.1 SENSOR.C5
N$22: C19.1 SENSOR.D6
N$23: C20.1 SENSOR.B30
N$24: C21.1 SENSOR.C30
N$25: C22.2 SENSOR.F2
N$26: C23.2 SENSOR.B1
N$27: C24.2 SENSOR.B29
N$28: C25.2 SENSOR.C6
N$29: C26.2 SENSOR.D1
N$30: C27.2 SENSOR.F3
N$31: C28.2 SENSOR.H3
N$32: C29.1 SENSOR.A3
N$33: C30.1 SENSOR.B3
N$38: SENSOR.F4
N$39: SENSOR.E4
N$40: SENSOR.H4
N$41: SENSOR.G3
N$42: SENSOR.A2
N$172: R11.2 R12.1 USE.6
N$173: R5.2 R6.1 UNN.6
N$182: R8.2 R9.1 UNE.6
N$183: R10.2 R11.1 USE.3
N$188: R7.2 R8.1 UNE.3
N$191: R1.2 R2.1 UNW.3
N$192: R2.2 R3.1 UNW.6
N$193: R14.2 R15.1 USS.6
N$194: R13.2 R14.1 USS.3
N$195: R16.2 R17.1 USW.3
N$196: R17.2 R18.1 USW.6
N_CHK_V: C2.1 C3.1 C4.1 R19.1 TP1.TP UNE.8 UNN.8 UNW.8 X-NORTH.8 X-NORTH.10
N_I2C_V: C1.1 R1X.1 UEP.8 X-NORTH.135 X-NORTH.137
N_REF: R19.2 TP2.TP U1.3 U1.4 UNE.2 UNE.5 UNN.2 UNN.5 UNW.2 UNW.5
N_SCK: U4.15 X-NORTH.144
N_SCL: UEP.6 X-NORTH.143
N_SDA: UEP.5 X-NORTH.141
N_SDI: U4.13 X-NORTH.140
N_SDO: U4.14 X-NORTH.142
N_SPI_V: C71.1 U4.2 X-NORTH.134 X-NORTH.136
N_VE: C50.1 C51.1 C52.1 C53.1 C54.1 C55.1 C56.1 C67.1 C69.1 C75.1 C76.1 C77.1 C84.1 C85.1 C86.1 SENSOR.C26 SENSOR.C27 SENSOR.D3 SENSOR.D26 SENSOR.E26 SENSOR.F5 SENSOR.F26 TP7.TP U4.3 U4.5 U5.13 U6.13 X-NORTH.109 X-NORTH.115 X-NORTH.121 X-NORTH.127 X-NORTH.133
N_VE_CV: C10.1 R7.1 X-NORTH.6
N_VE_OV: UNE.7 X-NORTH.5
N_VE_UV: UNE.1 X-NORTH.11
N_VN: C31.1 C32.1 C33.1 C34.1 C35.1 C36.1 C37.1 C38.1 C39.1 C40.1 C41.1 C42.1 C43.1 C44.1 C68.1 C70.1 C78.1 C79.1 C80.1 C87.1 C88.1 C89.1 SENSOR.A10 SENSOR.A15 SENSOR.A16 SENSOR.A22 SENSOR.A26 SENSOR.A27 SENSOR.B4 SENSOR.E1 SENSOR.H5 SENSOR.H10 SENSOR.H15 SENSOR.H16 SENSOR.H22 SENSOR.H26 TP5.TP U5.5 U5.14 U5.15 U5.16 U6.14 U6.16 X-NORTH.49 X-NORTH.55 X-NORTH.61 X-NORTH.67 X-NORTH.73 X-NORTH.79 X-NORTH.85 X-NORTH.91 X-NORTH.97
N_VN_CV: C9.1 R4.1 X-NORTH.4
N_VN_OV: UNN.7 X-NORTH.3
N_VN_UV: UNN.1 X-NORTH.9
N_VW: C57.1 C58.1 C59.1 SENSOR.E2 SENSOR.G4 TP8.TP X-NORTH.13 X-NORTH.19 X-NORTH.25 X-NORTH.31 X-NORTH.37
N_VW_CV: C8.1 R1.1 X-NORTH.2
N_VW_OV: UNW.7 X-NORTH.1
N_VW_UV: UNW.1 X-NORTH.7
R5: R4.2 R5.1 UNN.3
S00_N: X-SOUTH.16
S00_P: X-SOUTH.14
S01_N: X-SOUTH.17
S01_P: X-SOUTH.15
S02_N: X-SOUTH.22
S02_P: X-SOUTH.20
S03_N: X-SOUTH.23
S03_P: X-SOUTH.21
S04_N: SENSOR.C24 X-SOUTH.28
S04_P: SENSOR.C25 X-SOUTH.26
S05_N: X-SOUTH.29
S05_P: X-SOUTH.27
S06_N: SENSOR.D23 X-SOUTH.34
S06_P: SENSOR.D24 X-SOUTH.32
S07_N: SENSOR.B24 X-SOUTH.35
S07_P: SENSOR.B25 X-SOUTH.33
S08_N: SENSOR.D21 X-SOUTH.40
S08_P: SENSOR.D22 X-SOUTH.38
S09_N: SENSOR.A23 X-SOUTH.41
S09_P: SENSOR.A24 X-SOUTH.39
S10_N: SENSOR.C21 X-SOUTH.46
S10_P: SENSOR.C22 X-SOUTH.44
S11_N: SENSOR.B20 X-SOUTH.47
S11_P: SENSOR.B21 X-SOUTH.45
S12_N: SENSOR.D19 X-SOUTH.52
S12_P: SENSOR.D20 X-SOUTH.50
S13_N: SENSOR.A19 X-SOUTH.53
S13_P: SENSOR.A20 X-SOUTH.51
S14_N: SENSOR.C19 X-SOUTH.58
S14_P: SENSOR.C20 X-SOUTH.56
S15_N: SENSOR.B18 X-SOUTH.59
S15_P: SENSOR.B19 X-SOUTH.57
S16_N: SENSOR.C17 X-SOUTH.64
S16_P: SENSOR.C18 X-SOUTH.62
S17_N: SENSOR.A17 X-SOUTH.65
S17_P: SENSOR.A18 X-SOUTH.63
S18_N: SENSOR.D17 X-SOUTH.70
S18_P: SENSOR.D18 X-SOUTH.68
S19_N: SENSOR.B16 X-SOUTH.71
S19_P: SENSOR.B17 X-SOUTH.69
S20_N: SENSOR.D15 X-SOUTH.76
S20_P: SENSOR.D16 X-SOUTH.74
S21_N: SENSOR.B14 X-SOUTH.77
S21_P: SENSOR.B15 X-SOUTH.75
S22_N: SENSOR.D13 X-SOUTH.82
S22_P: SENSOR.D14 X-SOUTH.80
S23_N: SENSOR.A13 X-SOUTH.83
S23_P: SENSOR.A14 X-SOUTH.81
S24_N: SENSOR.C13 X-SOUTH.88
S24_P: SENSOR.C14 X-SOUTH.86
S25_N: SENSOR.B12 X-SOUTH.89
S25_P: SENSOR.B13 X-SOUTH.87
S26_N: SENSOR.D11 X-SOUTH.94
S26_P: SENSOR.D12 X-SOUTH.92
S27_N: SENSOR.A11 X-SOUTH.95
S27_P: SENSOR.A12 X-SOUTH.93
S28_N: SENSOR.C11 X-SOUTH.100
S28_P: SENSOR.C12 X-SOUTH.98
S29_N: SENSOR.B10 X-SOUTH.101
S29_P: SENSOR.B11 X-SOUTH.99
S30_N: SENSOR.C9 X-SOUTH.106
S30_P: SENSOR.C10 X-SOUTH.104
S31_N: SENSOR.B8 X-SOUTH.107
S31_P: SENSOR.B9 X-SOUTH.105
S32_N: SENSOR.D9 X-SOUTH.112
S32_P: SENSOR.D10 X-SOUTH.110
S33_N: SENSOR.A7 X-SOUTH.113
S33_P: SENSOR.A8 X-SOUTH.111
S34_N: SENSOR.C7 X-SOUTH.118
S34_P: SENSOR.C8 X-SOUTH.116
S35_N: SENSOR.B6 X-SOUTH.119
S35_P: SENSOR.B7 X-SOUTH.117
S36_N: SENSOR.D7 X-SOUTH.124
S36_P: SENSOR.D8 X-SOUTH.122
S37_N: SENSOR.A5 X-SOUTH.125
S37_P: SENSOR.A6 X-SOUTH.123
S38_N: X-SOUTH.130
S38_P: X-SOUTH.128
S39_N: U3.6 X-SOUTH.131
S39_P: X-SOUTH.129
S_CHK_V: C5.1 C6.1 C7.1 R20.1 TP3.TP USE.8 USS.8 USW.8 X-SOUTH.8 X-SOUTH.10
S_I2C_V: X-SOUTH.135 X-SOUTH.137
S_REF: R20.2 TP4.TP U2.3 U2.4 USE.2 USE.5 USS.2 USS.5 USW.2 USW.5
S_SCK: X-SOUTH.144
S_SCL: X-SOUTH.143
S_SDA: X-SOUTH.141
S_SDI: X-SOUTH.140
S_SDO: X-SOUTH.142
S_SPI_V: X-SOUTH.134 X-SOUTH.136
S_VE: X-SOUTH.13 X-SOUTH.19 X-SOUTH.25 X-SOUTH.31 X-SOUTH.37
S_VE_CV: C11.1 R10.1 X-SOUTH.2
S_VE_OV: USE.7 X-SOUTH.1
S_VE_UV: USE.1 X-SOUTH.7
S_VS: C45.1 C46.1 C47.1 C48.1 C49.1 C72.1 C73.1 C74.1 C81.1 C82.1 C83.1 SENSOR.A30 SENSOR.D28 SENSOR.D30 SENSOR.G1 SENSOR.H28 TP6.TP X-SOUTH.49 X-SOUTH.55 X-SOUTH.61 X-SOUTH.67 X-SOUTH.73 X-SOUTH.79 X-SOUTH.85 X-SOUTH.91 X-SOUTH.97
S_VS_CV: C12.1 R13.1 X-SOUTH.4
S_VS_OV: USS.7 X-SOUTH.3
S_VS_UV: USS.1 X-SOUTH.9
S_VW: C90.1 U3.1 U3.3 X-SOUTH.109 X-SOUTH.115 X-SOUTH.121 X-SOUTH.127 X-SOUTH.133
S_VW_CV: C13.1 R16.1 X-SOUTH.6
S_VW_OV: USW.7 X-SOUTH.5
S_VW_UV: USW.1 X-SOUTH.11
SPI_CLK: SENSOR.H29 U4.6
SPI_EN: SENSOR.F28 U6.9
SPI_IN: SENSOR.E28 U4.7
SPI_OUT: SENSOR.G28 U4.8
SYS_RES_N: SENSOR.F30 U5.10
T_EXP1: SENSOR.H30 U5.12
T_EXP2: SENSOR.E29 U6.10
TDIG1: SENSOR.G27 U5.9
TDIG2: SENSOR.G26 U6.11
VRAMP1: C16.1 R23.1 SENSOR.G29
VRAMP2: C17.1 R23.2 SENSOR.F29
VTREF: C65.1 C91.2 R21.2 R24.1 SENSOR.B2 U3.4
VTSIG: C66.1 R24.2 SENSOR.C2

## Tracks (layer width: path | path; a pad name or v marks a point on that pad's centre or on a via)
CLK_IN  (via drill 0.25)
  Top 0.152: SENSOR.E30 46.35,39.37 arc-45 46.8,39.18 48.2,37.78 arc-45 48.39,37.33 v48.39,35.56
  Bottom 0.152: U6.12 48.9,35.15 arc-45 48.72,35.23 v48.39,35.56
FRAME_REQ  (via drill 0.25)
  Top 0.152: SENSOR.G30 46.35,41.91 arc-45 46.8,41.72 49.6,38.92 arc45 50.05,38.73 v50.8,38.73
  Bottom 0.152: U5.11 51.08,38.56 arc-45 50.9,38.63 v50.8,38.73
GND  (via drill 0.25)
  Bottom 0.152: X-NORTH.139 v45.33,54.61 | X-SOUTH.139 v11.82,2.54
  other vias: 1.27,55.88 1.27,1.27 0.63,3.18 0.63,5.71 0.63,8.25 0.63,10.79 0.63,13.33 0.63,15.88 0.63,18.41 0.63,20.95 0.63,23.49 0.63,26.04 0.63,28.57 0.63,31.11 0.63,33.66 0.63,36.2 0.63,38.73 0.63,41.27 0.63,43.81 0.63,46.36 0.63,48.89 0.63,51.44 0.63,53.97 56.52,3.18 56.52,5.71 56.52,8.25 56.52,10.79 56.52,13.33 56.52,15.88 56.52,18.41 56.52,20.95 56.52,23.49 56.52,26.04 56.52,28.57 56.52,31.11 56.52,33.66 56.52,36.2 56.52,38.73 56.52,41.27 56.52,43.81 56.52,46.36 56.52,48.89 56.52,51.44 56.52,53.97 55.88,55.88 53.97,56.52 51.44,56.52 48.89,56.52 46.36,56.52 43.81,56.52 41.27,56.52 38.73,56.52 36.2,56.52 33.66,56.52 31.11,56.52 28.57,56.52 26.04,56.52 23.49,56.52 20.95,56.52 18.41,56.52 15.88,56.52 13.33,56.52 10.79,56.52 8.25,56.52 5.71,56.52 3.18,56.52 53.97,0.63 51.44,0.63 48.89,0.63 46.36,0.63 43.81,0.63 41.27,0.63 38.73,0.63 36.2,0.63 33.66,0.63 31.11,0.63 28.57,0.63 26.04,0.63 23.49,0.63 20.95,0.63 18.41,0.63 15.88,0.63 13.33,0.63 10.79,0.63 8.25,0.63 5.71,0.63 3.18,0.63 55.88,1.27 15.71,46.36 16.98,46.36 18.25,46.36 19.52,46.36 14.44,45.72 20.79,45.72 22.06,46.36 23.33,46.36 24.6,46.36 25.87,46.36 27.77,46.36 29.68,46.36 30.95,46.36 32.22,46.36 33.49,46.36 33.49,44.45 34.76,44.45 32.22,44.45 30.95,44.45 29.68,44.45 25.87,44.45 24.6,44.45 23.33,44.45 22.06,44.45 19.52,44.45 18.25,44.45 16.98,44.45 15.71,44.45 36.03,45.72 38.57,44.45 39.84,44.45 37.3,44.45 14.44,12.7 15.71,12.7 16.98,12.7 18.25,12.7 19.52,12.7 20.79,11.43 22.06,12.7 23.33,12.7 24.6,12.7 25.87,12.7 27.14,11.43 28.41,11.43 29.68,12.7 30.95,12.7 32.22,12.7 33.49,12.7 34.76,12.7 36.03,11.43 37.3,12.7 38.57,12.7 39.84,12.7 37.3,10.79 38.57,10.79 39.84,10.79 34.76,10.79 33.49,10.79 32.22,10.79 30.95,10.79 29.68,10.79 25.87,10.79 24.6,10.79 23.33,10.79 22.06,10.79 19.52,10.79 18.25,10.79 16.98,10.79 15.71,10.79 14.44,10.79 42.38,45.72 43.65,45.72 11.9,45.72 13.17,45.72 13.17,36.83 14.44,36.83 10.63,36.83 9.36,36.83 42.38,36.83 43.65,36.83 41.11,20.32 42.38,20.32 43.65,20.32 44.92,20.32 46.19,20.32 9.36,20.32 10.63,20.32 11.9,20.32 13.17,20.32 14.44,20.32 15.71,20.32 41.11,11.43 42.38,11.43 43.65,11.43 44.92,11.43 46.19,11.43 9.36,11.43 10.63,11.43 11.9,11.43 13.17,11.43 16.32,6.86 17.82,6.86 19.32,6.86 20.79,6.86 22.32,6.86 23.82,6.86 25.32,6.86 26.82,6.86 28.32,6.86 29.82,6.86 31.32,6.86 32.83,6.86 34.33,6.86 35.83,6.86 37.33,6.86 38.83,6.86 14.82,6.86 13.82,50.29 15.32,50.29 16.82,50.29 18.32,50.29 19.82,50.29 21.32,50.29 22.82,50.29 24.32,50.29 25.74,50.29 27.32,50.29 28.82,50.29 30.32,50.29 31.82,50.29 33.33,50.29 34.83,50.29 36.33,50.29 37.83,50.29 39.33,50.29 11.9,36.83 41.11,36.83 44.92,36.83 41.11,45.72 10.63,45.72 9.36,45.72 39.84,46.36 34.76,45.72 37.3,45.72
  pour Bottom: 55.88,57.15 1.27,57.15 0,55.88 0,1.27 1.27,0 55.88,0 57.15,1.27 57.15,55.88
  pour Top: 55.88,57.15 1.27,57.15 0,55.88 0,1.27 1.27,0 55.88,0 57.15,1.27 57.15,55.88
  pour Route2 (rank 3): 55.88,57.15 1.27,57.15 0,55.88 0,1.27 1.27,0 55.88,0 57.15,1.27 57.15,55.88
  pour Route15 (rank 3): 55.88,57.15 1.27,57.15 0,55.88 0,1.27 1.27,0 55.88,0 57.15,1.27 57.15,55.88
N00_N
  Bottom 0.152: X-NORTH.16 14.32,47.69 arc45 14.51,47.24 15.03,46.73 arc-45 15.21,46.28 15.21,40.13 arc45 15.4,39.68 SENSOR.E6 15.73,39.35 R25.2
N00_P
  Bottom 0.152: X-NORTH.14 13.82,47.8 arc45 14.01,47.35 14.75,46.61 arc-45 14.93,46.16 14.93,40.13 arc-45 14.75,39.68 SENSOR.E5 14.74,39.07 arc-45 14.93,38.62 R25.1
N01_N  (via drill 0.25)
  Top 0.152: v14.82,50.93 14.82,50.84 arc-45 14.79,50.75 14.74,50.71 arc45 14.71,50.62 14.71,48.84 arc45 14.89,48.39 16.3,46.98 arc-45 16.48,46.53 16.48,42.67 arc45 16.67,42.22 SENSOR.G7
  Bottom 0.152: X-NORTH.17 v14.82,50.93
N01_P  (via drill 0.25)
  Top 0.152: v14.32,51.31 14.32,50.83 arc45 14.36,50.74 14.39,50.71 arc-45 14.43,50.62 14.43,48.72 arc45 14.61,48.27 16.02,46.86 arc-45 16.2,46.41 16.2,42.67 arc-45 16.02,42.22 SENSOR.G6
  Bottom 0.152: X-NORTH.15 v14.32,51.31
N02_N
  Bottom 0.152: X-NORTH.22 15.82,47.72 arc45 16.01,47.27 16.3,46.98 arc-45 16.48,46.53 16.48,41.4 arc45 16.67,40.95 SENSOR.F7
N02_P
  Bottom 0.152: X-NORTH.20 15.32,47.82 arc45 15.51,47.37 16.02,46.86 arc-45 16.2,46.41 16.2,41.4 arc-45 16.02,40.95 SENSOR.F6
N03_N  (via drill 0.25)
  Bottom 0.152: X-NORTH.23 v16.32,50.93
N03_P  (via drill 0.25)
  Bottom 0.152: X-NORTH.21 v15.82,51.31
N04_N
  Bottom 0.152: X-NORTH.28 17.32,47.74 arc45 17.51,47.29 17.57,47.23 arc-45 17.75,46.78 17.75,40.13 arc45 17.94,39.68 SENSOR.E8
N04_P
  Bottom 0.152: X-NORTH.26 16.82,47.84 arc45 17.01,47.4 17.29,47.12 arc-45 17.48,46.67 17.48,40.13 arc-45 17.29,39.68 SENSOR.E7
N05_N  (via drill 0.25)
  Top 0.152: v17.82,50.93 17.82,50.66 arc-45 17.79,50.58 arc45 17.75,50.49 17.75,43.94 arc45 17.94,43.49 SENSOR.H8
  Bottom 0.152: X-NORTH.29 v17.82,50.93
N05_P  (via drill 0.25)
  Top 0.152: v17.32,51.31 17.32,50.75 arc45 17.36,50.66 17.44,50.58 arc-45 17.48,50.49 17.48,43.94 arc-45 17.29,43.49 SENSOR.H7
  Bottom 0.152: X-NORTH.27 v17.32,51.31
N06_N
  Bottom 0.152: X-NORTH.34 18.82,47.5 19.02,47.3 19.02,41.4 arc45 19.21,40.95 SENSOR.F9
N06_P
  Bottom 0.152: X-NORTH.32 18.32,47.61 18.74,47.19 18.74,41.4 arc-45 18.56,40.95 SENSOR.F8
N07_N  (via drill 0.25)
  Top 0.152: v19.32,50.93 19.32,50.85 19.19,50.71 arc45 19.15,50.62 19.15,48.96 19.02,48.84 19.02,42.67 arc45 19.21,42.22 SENSOR.G9
  Bottom 0.152: X-NORTH.35 v19.32,50.93
N07_P  (via drill 0.25)
  Top 0.152: v18.82,51.31 18.82,50.73 arc45 18.84,50.71 arc-45 18.87,50.62 18.87,49.08 18.74,48.95 18.74,42.67 arc-45 18.56,42.22 SENSOR.G8
  Bottom 0.152: X-NORTH.33 v18.82,51.31
N08_N
  Bottom 0.152: X-NORTH.40 20.32,47.4 20.3,47.37 20.3,40.13 arc45 20.48,39.68 SENSOR.E10
N08_P
  Bottom 0.152: X-NORTH.38 19.82,47.56 20.02,47.37 20.02,40.13 arc-45 19.83,39.68 SENSOR.E9
N09_N  (via drill 0.25)
  Top 0.152: v20.82,50.93 20.82,50.82 20.71,50.71 arc45 20.68,50.62 20.68,48.45 arc45 20.86,48 21.38,47.49 arc-45 21.56,47.04 21.56,42.67 arc45 21.75,42.22 SENSOR.G11
  Bottom 0.152: X-NORTH.41 v20.82,50.93
N09_P  (via drill 0.25)
  Top 0.152: v20.32,51.31 20.32,50.79 arc45 20.36,50.71 arc-45 20.4,50.62 20.4,48.34 arc45 20.58,47.89 21.1,47.37 arc-45 21.29,46.92 21.29,42.67 arc-45 21.1,42.22 SENSOR.G10
  Bottom 0.152: X-NORTH.39 v20.32,51.31
N10_N
  Bottom 0.152: X-NORTH.46 21.82,47.57 21.56,47.31 21.56,41.4 arc45 21.75,40.95 SENSOR.F11
N10_P
  Bottom 0.152: X-NORTH.44 21.32,47.47 21.29,47.51 21.29,41.4 arc-45 21.1,40.95 SENSOR.F10
N11_N  (via drill 0.25)
  Top 0.152: v22.32,50.93 22.32,50.8 22.24,50.71 arc45 22.2,50.62 22.2,48.84 arc45 22.39,48.39 22.65,48.12 arc-45 22.84,47.67 22.84,43.94 arc45 23.02,43.49 SENSOR.H12
  Bottom 0.152: X-NORTH.47 v22.32,50.93
N11_P  (via drill 0.25)
  Top 0.152: v21.82,51.31 21.82,50.82 arc45 21.86,50.73 21.88,50.71 arc-45 21.92,50.62 21.92,48.72 arc45 22.11,48.27 22.37,48.01 arc-45 22.55,47.56 22.55,43.94 arc-45 22.37,43.49 SENSOR.H11
  Bottom 0.152: X-NORTH.45 v21.82,51.31
N12_N
  Bottom 0.152: X-NORTH.52 23.32,47.55 22.84,47.06 22.84,40.13 arc45 23.02,39.68 SENSOR.E12
N12_P
  Bottom 0.152: X-NORTH.50 22.82,47.45 22.55,47.17 22.55,40.13 arc-45 22.37,39.68 SENSOR.E11
N13_N  (via drill 0.25)
  Top 0.152: v23.82,50.93 23.82,50.77 23.76,50.71 arc45 23.72,50.62 23.72,49.22 arc45 23.91,48.77 23.92,48.76 arc-45 24.11,48.31 24.11,42.67 arc45 24.29,42.22 SENSOR.G13
  Bottom 0.152: X-NORTH.53 v23.82,50.93
N13_P  (via drill 0.25)
  Top 0.152: v23.32,51.31 23.32,50.84 arc45 23.36,50.75 23.41,50.71 arc-45 23.44,50.62 23.44,49.1 arc45 23.63,48.65 23.64,48.64 arc-45 23.82,48.19 23.82,42.67 arc-45 23.64,42.22 SENSOR.G12
  Bottom 0.152: X-NORTH.51 v23.32,51.31
N14_N
  Bottom 0.152: X-NORTH.58 24.82,47.79 arc-45 24.64,47.34 24.29,46.99 arc45 24.11,46.54 24.11,41.4 arc45 24.29,40.95 SENSOR.F13
N14_P
  Bottom 0.152: X-NORTH.56 24.32,47.68 arc-45 24.14,47.23 24.01,47.11 arc45 23.82,46.66 23.82,41.4 arc-45 23.64,40.95 SENSOR.F12
N15_N  (via drill 0.25)
  Top 0.152: v25.32,50.93 25.32,50.75 25.29,50.71 arc45 25.25,50.62 25.25,49.41 arc45 25.3,49.28 arc-45 25.38,49.1 25.38,43.94 arc45 25.56,43.49 SENSOR.H14
  Bottom 0.152: X-NORTH.59 v25.32,50.93
N15_P  (via drill 0.25)
  Top 0.152: v24.82,51.31 24.82,50.87 arc45 24.86,50.78 24.93,50.71 arc-45 24.97,50.62 24.97,49.32 arc45 25.04,49.14 arc-45 25.09,49.02 25.09,43.94 arc-45 24.91,43.49 SENSOR.H13
  Bottom 0.152: X-NORTH.57 v24.82,51.31
N16_N
  Bottom 0.152: X-NORTH.64 26.32,47.76 arc-45 26.14,47.31 25.56,46.74 arc45 25.38,46.29 25.38,40.13 arc45 25.56,39.68 SENSOR.E14
N16_P
  Bottom 0.152: X-NORTH.62 25.82,47.66 arc-45 25.64,47.21 25.28,46.85 arc45 25.09,46.4 25.09,40.13 arc-45 24.91,39.68 SENSOR.E13
N17_N  (via drill 0.25)
  Top 0.152: v26.82,50.93 26.82,50.85 26.68,50.71 arc45 26.64,50.62 26.64,42.67 arc45 26.83,42.22 SENSOR.G15
  Bottom 0.152: X-NORTH.65 v26.82,50.93
N17_P  (via drill 0.25)
  Top 0.152: v26.32,51.31 26.32,50.72 arc45 26.33,50.71 arc-45 26.36,50.62 26.36,42.67 arc-45 26.18,42.22 SENSOR.G14
  Bottom 0.152: X-NORTH.63 v26.32,51.31
N18_N
  Bottom 0.152: X-NORTH.70 27.82,47.74 arc-45 27.64,47.29 26.83,46.48 arc45 26.64,46.03 26.64,41.4 arc45 26.83,40.95 SENSOR.F15
N18_P
  Bottom 0.152: X-NORTH.68 27.32,47.64 arc-45 27.14,47.19 26.55,46.6 arc45 26.36,46.15 26.36,41.4 arc-45 26.18,40.95 SENSOR.F14
N19_N  (via drill 0.25)
  Top 0.152: v28.32,50.93 28.32,50.83 28.21,50.71 arc45 28.17,50.62 28.17,48.45 arc45 28.36,48 29,47.36 arc-45 29.18,46.91 29.18,42.67 arc45 29.37,42.22 SENSOR.G17
  Bottom 0.152: X-NORTH.71 v28.32,50.93
N19_P  (via drill 0.25)
  Top 0.152: v27.82,51.31 27.82,50.78 arc45 27.85,50.71 arc-45 27.89,50.62 27.89,48.34 arc45 28.07,47.89 28.72,47.25 arc-45 28.9,46.8 28.9,42.67 arc-45 28.72,42.22 SENSOR.G16
  Bottom 0.152: X-NORTH.69 v27.82,51.31
N20_N
  Bottom 0.152: X-NORTH.76 29.32,47.51 29.18,47.37 29.18,41.4 arc45 29.37,40.95 SENSOR.F17
N20_P
  Bottom 0.152: X-NORTH.74 28.82,47.45 28.9,47.37 28.9,41.4 arc-45 28.72,40.95 SENSOR.F16
N21_N  (via drill 0.25)
  Top 0.152: v29.82,50.93 29.82,50.8 29.73,50.71 arc45 29.69,50.62 29.69,48.84 arc45 29.88,48.39 30.27,48 arc-45 30.45,47.55 30.45,43.94 arc45 30.64,43.49 SENSOR.H18
  Bottom 0.152: X-NORTH.77 29.82,50.98 v29.82,50.93
N21_P  (via drill 0.25)
  Top 0.152: v29.32,51.31 29.32,50.81 arc45 29.36,50.72 29.38,50.71 arc-45 29.41,50.62 29.41,48.72 arc45 29.6,48.27 29.99,47.88 arc-45 30.18,47.43 30.18,43.94 arc-45 29.99,43.49 SENSOR.H17
  Bottom 0.152: X-NORTH.75 29.32,51.36 v29.32,51.31
N22_N
  Bottom 0.152: X-NORTH.82 30.82,47.56 30.45,47.19 30.45,40.13 arc45 30.64,39.68 SENSOR.E18
N22_P
  Bottom 0.152: X-NORTH.80 30.32,47.45 30.18,47.3 30.18,40.13 arc-45 29.99,39.68 SENSOR.E17
N23_N  (via drill 0.25)
  Top 0.152: v31.32,50.93 31.32,50.78 31.25,50.71 arc45 31.22,50.62 31.22,49.22 arc45 31.4,48.77 31.54,48.63 arc-45 31.72,48.18 31.72,42.67 arc45 31.91,42.22 SENSOR.G19
  Bottom 0.152: X-NORTH.83 31.32,50.98 v31.32,50.93
N23_P  (via drill 0.25)
  Top 0.152: v30.82,51.31 30.82,50.84 arc45 30.86,50.75 30.9,50.71 arc-45 30.94,50.62 30.94,49.1 arc45 31.12,48.65 31.26,48.52 arc-45 31.45,48.07 31.45,42.67 arc-45 31.26,42.22 SENSOR.G18
  Bottom 0.152: X-NORTH.81 30.82,51.36 v30.82,51.31
N24_N
  Bottom 0.152: X-NORTH.88 32.33,47.8 arc-45 32.14,47.35 31.91,47.12 arc45 31.72,46.67 31.72,41.4 arc45 31.91,40.95 SENSOR.F19
N24_P
  Bottom 0.152: X-NORTH.86 31.82,47.69 arc-45 31.64,47.24 31.63,47.23 arc45 31.45,46.78 31.45,41.4 arc-45 31.26,40.95 SENSOR.F18
N25_N  (via drill 0.25)
  Top 0.152: v32.83,50.93 32.83,50.76 32.78,50.71 arc45 32.74,50.62 32.74,49.49 arc45 32.85,49.22 32.88,49.19 arc-45 32.99,48.92 32.99,43.94 arc45 33.18,43.49 SENSOR.H20
  Bottom 0.152: X-NORTH.89 32.83,50.98 v32.83,50.93
N25_P  (via drill 0.25)
  Top 0.152: v32.33,51.31 32.33,50.86 arc45 32.36,50.77 32.42,50.71 arc-45 32.46,50.62 32.46,49.38 arc45 32.57,49.11 32.6,49.08 arc-45 32.71,48.81 32.71,43.94 arc-45 32.53,43.49 SENSOR.H19
  Bottom 0.152: X-NORTH.87 32.33,51.36 v32.33,51.31
N26_N
  Bottom 0.152: X-NORTH.94 33.83,47.77 arc-45 33.64,47.32 33.18,46.86 arc45 32.99,46.41 32.99,40.13 arc45 33.18,39.68 SENSOR.E20
N26_P
  Bottom 0.152: X-NORTH.92 33.33,47.67 arc-45 33.14,47.22 32.9,46.98 arc45 32.71,46.53 32.71,40.13 arc-45 32.53,39.68 SENSOR.E19
N27_N  (via drill 0.25)
  Top 0.152: v34.33,50.93 34.33,50.86 34.17,50.71 arc45 34.14,50.62 34.14,49.79 arc45 34.19,49.66 arc-45 34.27,49.48 34.27,42.67 arc45 34.45,42.22 SENSOR.G21
  Bottom 0.152: X-NORTH.95 34.33,50.98 v34.33,50.93
N27_P  (via drill 0.25)
  Top 0.152: v33.83,51.31 33.83,50.71 arc-45 33.86,50.63 33.86,49.67 arc45 33.91,49.55 arc-45 33.98,49.37 33.98,42.67 arc-45 33.8,42.22 SENSOR.G20
  Bottom 0.152: X-NORTH.93 33.83,51.36 v33.83,51.31
N28_N
  Bottom 0.152: X-NORTH.100 35.33,47.75 arc-45 35.14,47.3 34.45,46.61 arc45 34.27,46.16 34.27,41.4 arc45 34.45,40.95 SENSOR.F21
N28_P
  Bottom 0.152: X-NORTH.98 34.83,47.64 arc-45 34.64,47.19 34.17,46.73 arc45 33.98,46.28 33.98,41.4 arc-45 33.8,40.95 SENSOR.F20
N29_N  (via drill 0.25)
  Top 0.152: v35.83,50.93 35.83,50.89 arc-45 35.79,50.8 35.7,50.71 arc45 35.66,50.62 35.66,47.82 arc45 35.85,47.37 36.62,46.6 arc-45 36.8,46.15 36.8,42.67 arc45 36.99,42.22 SENSOR.G23
  Bottom 0.152: X-NORTH.101 35.83,50.98 v35.83,50.93
N29_P  (via drill 0.25)
  Top 0.152: v35.33,51.31 35.33,50.76 arc45 35.34,50.71 arc-45 35.38,50.62 35.38,47.7 arc45 35.57,47.25 36.34,46.48 arc-45 36.52,46.03 36.52,42.67 arc-45 36.34,42.22 SENSOR.G22
  Bottom 0.152: X-NORTH.99 35.33,51.36 v35.33,51.31
N30_N
  Bottom 0.152: X-NORTH.106 36.83,47.72 arc-45 36.64,47.27 35.72,46.36 arc45 35.53,45.91 35.53,40.13 arc45 35.72,39.68 SENSOR.E22
N30_P
  Bottom 0.152: X-NORTH.104 36.33,47.62 arc-45 36.14,47.17 35.44,46.47 arc45 35.25,46.02 35.25,40.13 arc-45 35.07,39.68 SENSOR.E21
N31_N  (via drill 0.25)
  Top 0.152: v37.33,50.93 37.33,50.81 37.22,50.71 arc45 37.19,50.62 37.19,48.2 arc45 37.37,47.75 37.89,47.23 arc-45 38.08,46.78 38.08,43.94 arc45 38.26,43.49 SENSOR.H24
  Bottom 0.152: X-NORTH.107 37.33,50.98 v37.33,50.93
N31_P  (via drill 0.25)
  Top 0.152: v36.83,51.31 36.83,50.81 arc45 36.86,50.72 36.87,50.71 arc-45 36.91,50.62 36.91,48.08 arc45 37.09,47.63 37.61,47.12 arc-45 37.8,46.67 37.8,43.94 arc-45 37.61,43.49 SENSOR.H23
  Bottom 0.152: X-NORTH.105 36.83,51.36 v36.83,51.31
N32_N
  Bottom 0.152: X-NORTH.112 38.33,47.7 arc-45 38.14,47.25 36.99,46.1 arc45 36.8,45.65 36.8,41.4 arc45 36.99,40.95 SENSOR.F23
N32_P
  Bottom 0.152: X-NORTH.110 37.83,47.59 arc-45 37.64,47.15 36.71,46.22 arc45 36.52,45.77 36.52,41.4 arc-45 36.34,40.95 SENSOR.F22
N33_N  (via drill 0.25)
  Top 0.152: v38.83,50.93 38.83,50.79 38.75,50.71 arc45 38.71,50.62 38.71,48.58 arc45 38.9,48.13 39.16,47.87 arc-45 39.34,47.42 39.34,42.67 arc45 39.53,42.22 SENSOR.G25
  Bottom 0.152: X-NORTH.113 38.83,50.98 v38.83,50.93
N33_P  (via drill 0.25)
  Top 0.152: v38.33,51.31 38.33,50.83 arc45 38.36,50.74 38.39,50.71 arc-45 38.43,50.62 38.43,48.47 arc45 38.62,48.02 38.88,47.75 arc-45 39.06,47.3 39.06,42.67 arc-45 38.88,42.22 SENSOR.G24
  Bottom 0.152: X-NORTH.111 38.33,51.36 v38.33,51.31
N34_N
  Bottom 0.152: X-NORTH.118 39.83,47.67 arc-45 39.64,47.23 38.26,45.85 arc45 38.08,45.4 38.08,40.13 arc45 38.26,39.68 SENSOR.E24
N34_P
  Bottom 0.152: X-NORTH.116 39.33,47.57 arc-45 39.14,47.12 37.98,45.96 arc45 37.8,45.52 37.8,40.13 arc-45 37.61,39.68 SENSOR.E23
N35_N  (via drill 0.25)
  Top 0.152: v40.33,50.29 41.41,49.21 arc45 41.86,49.02 43.02,49.02 43.84,48.19 arc45 44.29,48.01 44.82,48.01 arc-45 45.27,47.82 52.27,40.83 arc-45 52.45,40.38 52.45,38.11 arc45 52.64,37.66 52.77,37.52 arc-45 52.96,37.08 52.96,35.06 arc-45 52.77,34.61 v51.69,33.53
  Bottom 0.152: X-NORTH.119 v40.33,50.29 | U6.4 51.18,33.93 arc-45 51.36,33.86 v51.69,33.53
N35_P  (via drill 0.25)
  Top 0.152: v39.83,51.31 39.83,50.32 arc45 40.01,49.87 41.05,48.83 arc45 41.5,48.64 42.89,48.64 43.72,47.81 arc45 44.17,47.62 44.7,47.62 arc-45 45.14,47.44 51.88,40.7 arc-45 52.07,40.25 52.07,37.85 arc45 52.26,37.41 52.39,37.27 arc-45 52.58,36.82 52.58,35.31 arc-45 52.39,34.87 v51.69,34.16
  Bottom 0.152: X-NORTH.117 v39.83,51.31 | U6.3 51.41,34.34 arc-45 51.59,34.27 v51.69,34.16
N36_N
  Bottom 0.152: X-NORTH.124 41.33,47.19 41.22,47.08 41.22,46.71
N36_P
  Bottom 0.152: X-NORTH.122 40.83,47.19 40.94,47.08 40.94,46.71
N37_N  (via drill 0.25)
  Top 0.152: v54.1,37.97 53.4,38.68 arc-45 53.21,39.12 53.21,40.63 arc45 53.03,41.08 45.52,48.58 arc45 45.08,48.77 44.55,48.77 arc-45 44.1,48.95 43.45,49.6 arc45 43.01,49.78 42.6,49.78 arc-45 42.15,49.97 v41.83,50.29
  Bottom 0.152: X-NORTH.125 v41.83,50.29 | U5.3 53.82,38.15 arc-45 54,38.08 v54.1,37.97
N37_P  (via drill 0.25)
  Top 0.152: v54.1,37.34 53.02,38.42 arc-45 52.83,38.87 52.83,40.5 arc45 52.65,40.95 45.4,48.2 arc45 44.95,48.39 44.42,48.39 arc-45 43.97,48.57 43.14,49.4 42.13,49.4 arc-45 41.69,49.59 41.51,49.76 arc-45 41.33,50.21 v41.33,51.31
  Bottom 0.152: X-NORTH.123 v41.33,51.31 | U5.4 53.59,37.74 arc-45 53.77,37.67 v54.1,37.34
N38_N  (via drill 0.25)
  Top 0.152: v42.83,47.24 44.57,47.24 arc-45 45.02,47.06 50.87,41.21 arc-45 51.05,40.76 51.05,40.52 arc45 51.24,40.07 51.5,39.81 arc-45 51.69,39.36 51.69,37.6 arc45 51.88,37.15 52.01,37.02 arc-45 52.2,36.57 52.2,35.7 arc-45 52.01,35.25 v51.69,34.92
  Bottom 0.152: X-NORTH.130 v42.83,47.24 | U6.2 51.41,34.75 arc45 51.59,34.82 v51.69,34.92
N38_P  (via drill 0.25)
  Top 0.152: v42.33,46.48 42.62,46.48 arc45 43.07,46.67 43.08,46.68 arc-45 43.53,46.86 44.44,46.86 arc-45 44.89,46.68 50.49,41.08 arc-45 50.67,40.63 50.67,40.39 arc45 50.86,39.95 51.12,39.68 arc-45 51.31,39.23 51.31,37.35 arc45 51.49,36.9 51.5,36.89 arc-45 51.69,36.44 v51.69,35.56
  Bottom 0.152: X-NORTH.128 v42.33,46.48 | U6.1 51.18,35.15 arc45 51.36,35.23 v51.69,35.56
N39_N  (via drill 0.25)
  Top 0.152: v43.33,51.31 43.33,51.01 arc45 43.51,50.56 44.35,49.72 arc45 44.8,49.53 45.33,49.53 arc-45 45.78,49.34 53.92,41.21 arc-45 54.1,40.76 v54.1,39.37
  Bottom 0.152: X-NORTH.131 v43.33,51.31 | U5.1 53.59,38.96 arc45 53.77,39.04 v54.1,39.37
N39_P  (via drill 0.25)
  Top 0.152: v42.83,50.29 43.01,50.29 arc-45 43.45,50.11 44.23,49.34 arc45 44.67,49.15 45.2,49.15 arc-45 45.65,48.96 53.41,41.21 arc-45 53.59,40.76 53.59,39.38 arc45 53.78,38.93 53.97,38.73 v54.1,38.73
  Bottom 0.152: X-NORTH.129 v42.83,50.29 | U5.2 53.82,38.56 arc45 54,38.63 v54.1,38.73
N$1
  Bottom 0.152: UEP.7 50.67,46.86 arc-90 50.42,47.12 50.42,47.74 arc-45 50.61,48.19 51.27,48.86 arc-45 51.72,49.04 R1X.2 51.96,49.02 R2X.1
N$2  (via drill 2.6 pad 3.81)
  other vias: 3.81,53.34
N$3  (via drill 2.6 pad 3.81)
  other vias: 53.34,53.34
N$4  (via drill 2.6 pad 3.81)
  other vias: 3.81,3.81
N$5
  Bottom 0.254: C60.1 11.14,43.99 arc45 11.18,43.91 11.23,43.85 arc-45 11.27,43.76 11.27,42.81 arc-45 11.08,42.36 SENSOR.G2
N$6
  Bottom 0.254: C61.1 8.72,39.74 arc-45 8.91,40.19 SENSOR.F1
N$7  (via drill 2.6 pad 3.81)
  other vias: 53.34,3.81
N$11
  Bottom 0.254: C62.1 10.12,18.6 arc-45 10.07,18.47 arc45 10,18.29 10,17.41 arc-45 9.81,16.96 SENSOR.C1
N$12
  Bottom 0.254: C63.1 12.92,18.7 arc45 13.03,18.43 13.06,18.4 arc-45 13.17,18.13 SENSOR.D4
N$15
  Bottom 0.254: C64.1 44.41,18.59 arc-45 44.38,18.5 arc45 44.28,18.29 44.28,17.41 arc45 44.47,16.96 SENSOR.C29
N$16
  Bottom 0.254: C92.1 12.15,18.7 arc45 12.27,18.43 12.42,18.27 arc-45 12.54,18 12.54,17.41 arc45 12.72,16.96 SENSOR.C4
N$17
  Bottom 0.254: C14.1 13.3,13.68 arc45 SENSOR.A4
N$18
  Bottom 0.254: C15.1 SENSOR.D5
N$19
  Bottom 0.152: U3.5 5.21,17.13 R21.1 6.35,17.14 arc-90 6.73,16.76 6.73,16.53 arc90 6.98,16.27 R22.2
N$21
  Bottom 0.254: C18.1 13.68,18.62 arc45 13.73,18.49 arc-45 13.8,18.31 13.8,17.41 arc45 13.99,16.96 SENSOR.C5
N$22
  Bottom 0.254: C19.1 15.96,18.7 arc-45 15.85,18.43 15.82,18.4 arc45 15.71,18.13 SENSOR.D6
N$23
  Bottom 0.254: C20.1 45.43,13.15 arc-45 45.47,13.24 arc45 45.55,13.46 45.55,14.34 arc-45 45.74,14.79 SENSOR.B30
N$24
  Bottom 0.254: C21.1 45.43,18.59 arc45 45.47,18.5 arc-45 45.55,18.29 45.55,17.41 arc45 45.74,16.96 SENSOR.C30
N$25
  Bottom 0.254: C22.2 10.25,38.63 arc45 10.18,38.81 10.07,38.91 arc-45 10,39.09 10,39.74 arc-45 10.18,40.19 SENSOR.F2
N$26
  Bottom 0.254: C23.2 9.61,12.85 arc90 10,13.23 10,14.34 arc45 9.81,14.79 SENSOR.B1
N$27
  Bottom 0.254: C24.2 44.28,14.34 arc-45 44.47,14.79 SENSOR.B29
N$28
  Bottom 0.254: C25.2 15.2,18.62 arc-45 15.15,18.49 arc45 15.07,18.31 15.07,17.41 arc45 15.26,16.96 SENSOR.C6
N$29
  Bottom 0.254: C26.2 SENSOR.D1
N$30
  Bottom 0.254: C27.2 11.77,38.63 arc45 11.7,38.81 11.45,39.06 arc-45 11.27,39.51 11.27,39.74 arc-45 11.45,40.19 SENSOR.F3
N$31
  Bottom 0.254: C28.2 SENSOR.H3
N$32
  Bottom 0.254: C29.1 11.77,13.68 arc-45 SENSOR.A3
N$33
  Bottom 0.254: C30.1 11.01,13.18 arc-45 11.12,13.45 11.15,13.48 arc45 11.27,13.75 11.27,14.34 arc-45 11.45,14.79 SENSOR.B3
N$172  (via drill 0.25)
  Top 0.152: v49.89,15.11 50.28,15.11 arc45 50.73,15.3 50.87,15.43 arc-45 51.32,15.62 52.19,15.62 arc-45 52.64,15.43 v52.96,15.11
  Bottom 0.152: USE.6 53.09,14.88 arc45 53.02,15.06 v52.96,15.11
  Bottom 0.203: R11.2 R12.1 v49.89,15.11
N$173  (via drill 0.25)
  Top 0.152: v4.19,37.59 4.51,37.27 arc45 4.96,37.08 5.83,37.08 arc45 6.28,37.27 6.42,37.41 arc-45 6.87,37.59 v7.26,37.59
  Bottom 0.152: UNN.6 4.06,37.83 arc45 4.13,37.65 v4.19,37.59
  Bottom 0.203: R5.2 R6.1 v7.26,37.59
N$182  (via drill 0.25)
  Route15 0.152: v4.19,33.15 4.51,33.47 arc-45 4.96,33.66 5.83,33.66 arc-45 6.28,33.47 6.42,33.33 arc45 6.87,33.15 v7.26,33.15
  Bottom 0.152: UNE.6 4.06,33.38 arc45 4.13,33.2 v4.19,33.15
  Bottom 0.203: R8.2 R9.1 v7.26,33.15
N$183
  Bottom 0.152: USE.3 53.09,11.81 arc-90 52.84,11.56 51.56,11.56 arc-90 51.18,11.94 51.18,12.7 arc90 50.93,12.95 R10.2
  Bottom 0.203: R10.2 R11.1
N$188
  Bottom 0.152: UNE.3 4.06,36.45 arc-90 4.31,36.7 5.59,36.7 arc-90 5.97,36.32 5.97,35.56 arc90 6.22,35.31 R7.2
  Bottom 0.203: R8.1 R7.2
N$191
  Bottom 0.152: UNW.3 4.06,45.34 arc-90 4.31,45.59 5.59,45.59 arc-90 5.97,45.21 5.97,44.45 arc90 6.22,44.2 R1.2
  Bottom 0.203: R1.2 R2.1
N$192  (via drill 0.25)
  Top 0.152: v7.26,42.04 6.87,42.04 arc45 6.42,41.85 6.28,41.72 arc-45 5.83,41.53 4.96,41.53 arc-45 4.51,41.72 v4.19,42.04
  Bottom 0.152: UNW.6 4.06,42.17 v4.19,42.04
  Bottom 0.203: R2.2 R3.1 v7.26,42.04
N$193  (via drill 0.25)
  Top 0.152: v52.96,19.56 52.64,19.88 arc45 52.19,20.07 51.32,20.07 arc45 50.87,19.88 50.73,19.74 arc-45 50.28,19.56 v49.89,19.56
  Bottom 0.152: USS.6 53.09,19.32 arc45 53.02,19.5 v52.96,19.56
  Bottom 0.203: R14.2 R15.1 v49.89,19.56
N$194
  Bottom 0.152: USS.3 53.09,16.26 arc-90 52.84,16 51.56,16 arc-90 51.18,16.38 51.18,17.14 arc90 50.93,17.4 R13.2
  Bottom 0.203: R14.1 R13.2
N$195
  Bottom 0.152: USW.3 53.09,20.7 arc-90 52.84,20.45 51.56,20.45 arc-90 51.18,20.83 51.18,21.59 arc90 50.93,21.84 R16.2
  Bottom 0.203: R17.1 R16.2
N$196  (via drill 0.25)
  Route15 0.152: v52.96,24 52.64,23.68 arc-45 52.19,23.49 51.32,23.49 arc-45 50.87,23.68 50.73,23.82 arc45 50.28,24 v49.89,24
  Bottom 0.152: USW.6 53.09,23.77 arc45 53.02,23.95 v52.96,24 | R17.2 R18.1 v49.89,24
N_CHK_V  (via drill 0.25)
  Top 0.152: v5.46,43.18 3.56,43.18 arc90 2.92,42.55 v2.92,42.04 | v2.92,33.15 2.92,33.66 arc-90 3.56,34.29 v5.46,34.29 | v5.46,38.73 3.56,38.73 arc90 2.92,38.1 v2.92,37.59